# Altium PCB VM52-T2.PcbDoc (part 1 of 2)
Units mm, origin at the board's own origin, x right, y up, seen from the top; angles counter-clockwise.
Board outline 156.25 x 95.25 mm, 4 copper layers (Top Layer, Internal Plane 1, Internal Plane 2, Bottom Layer), stack 0 mm thick; 194 components, 129 nets, 738 pads, 719 vias.
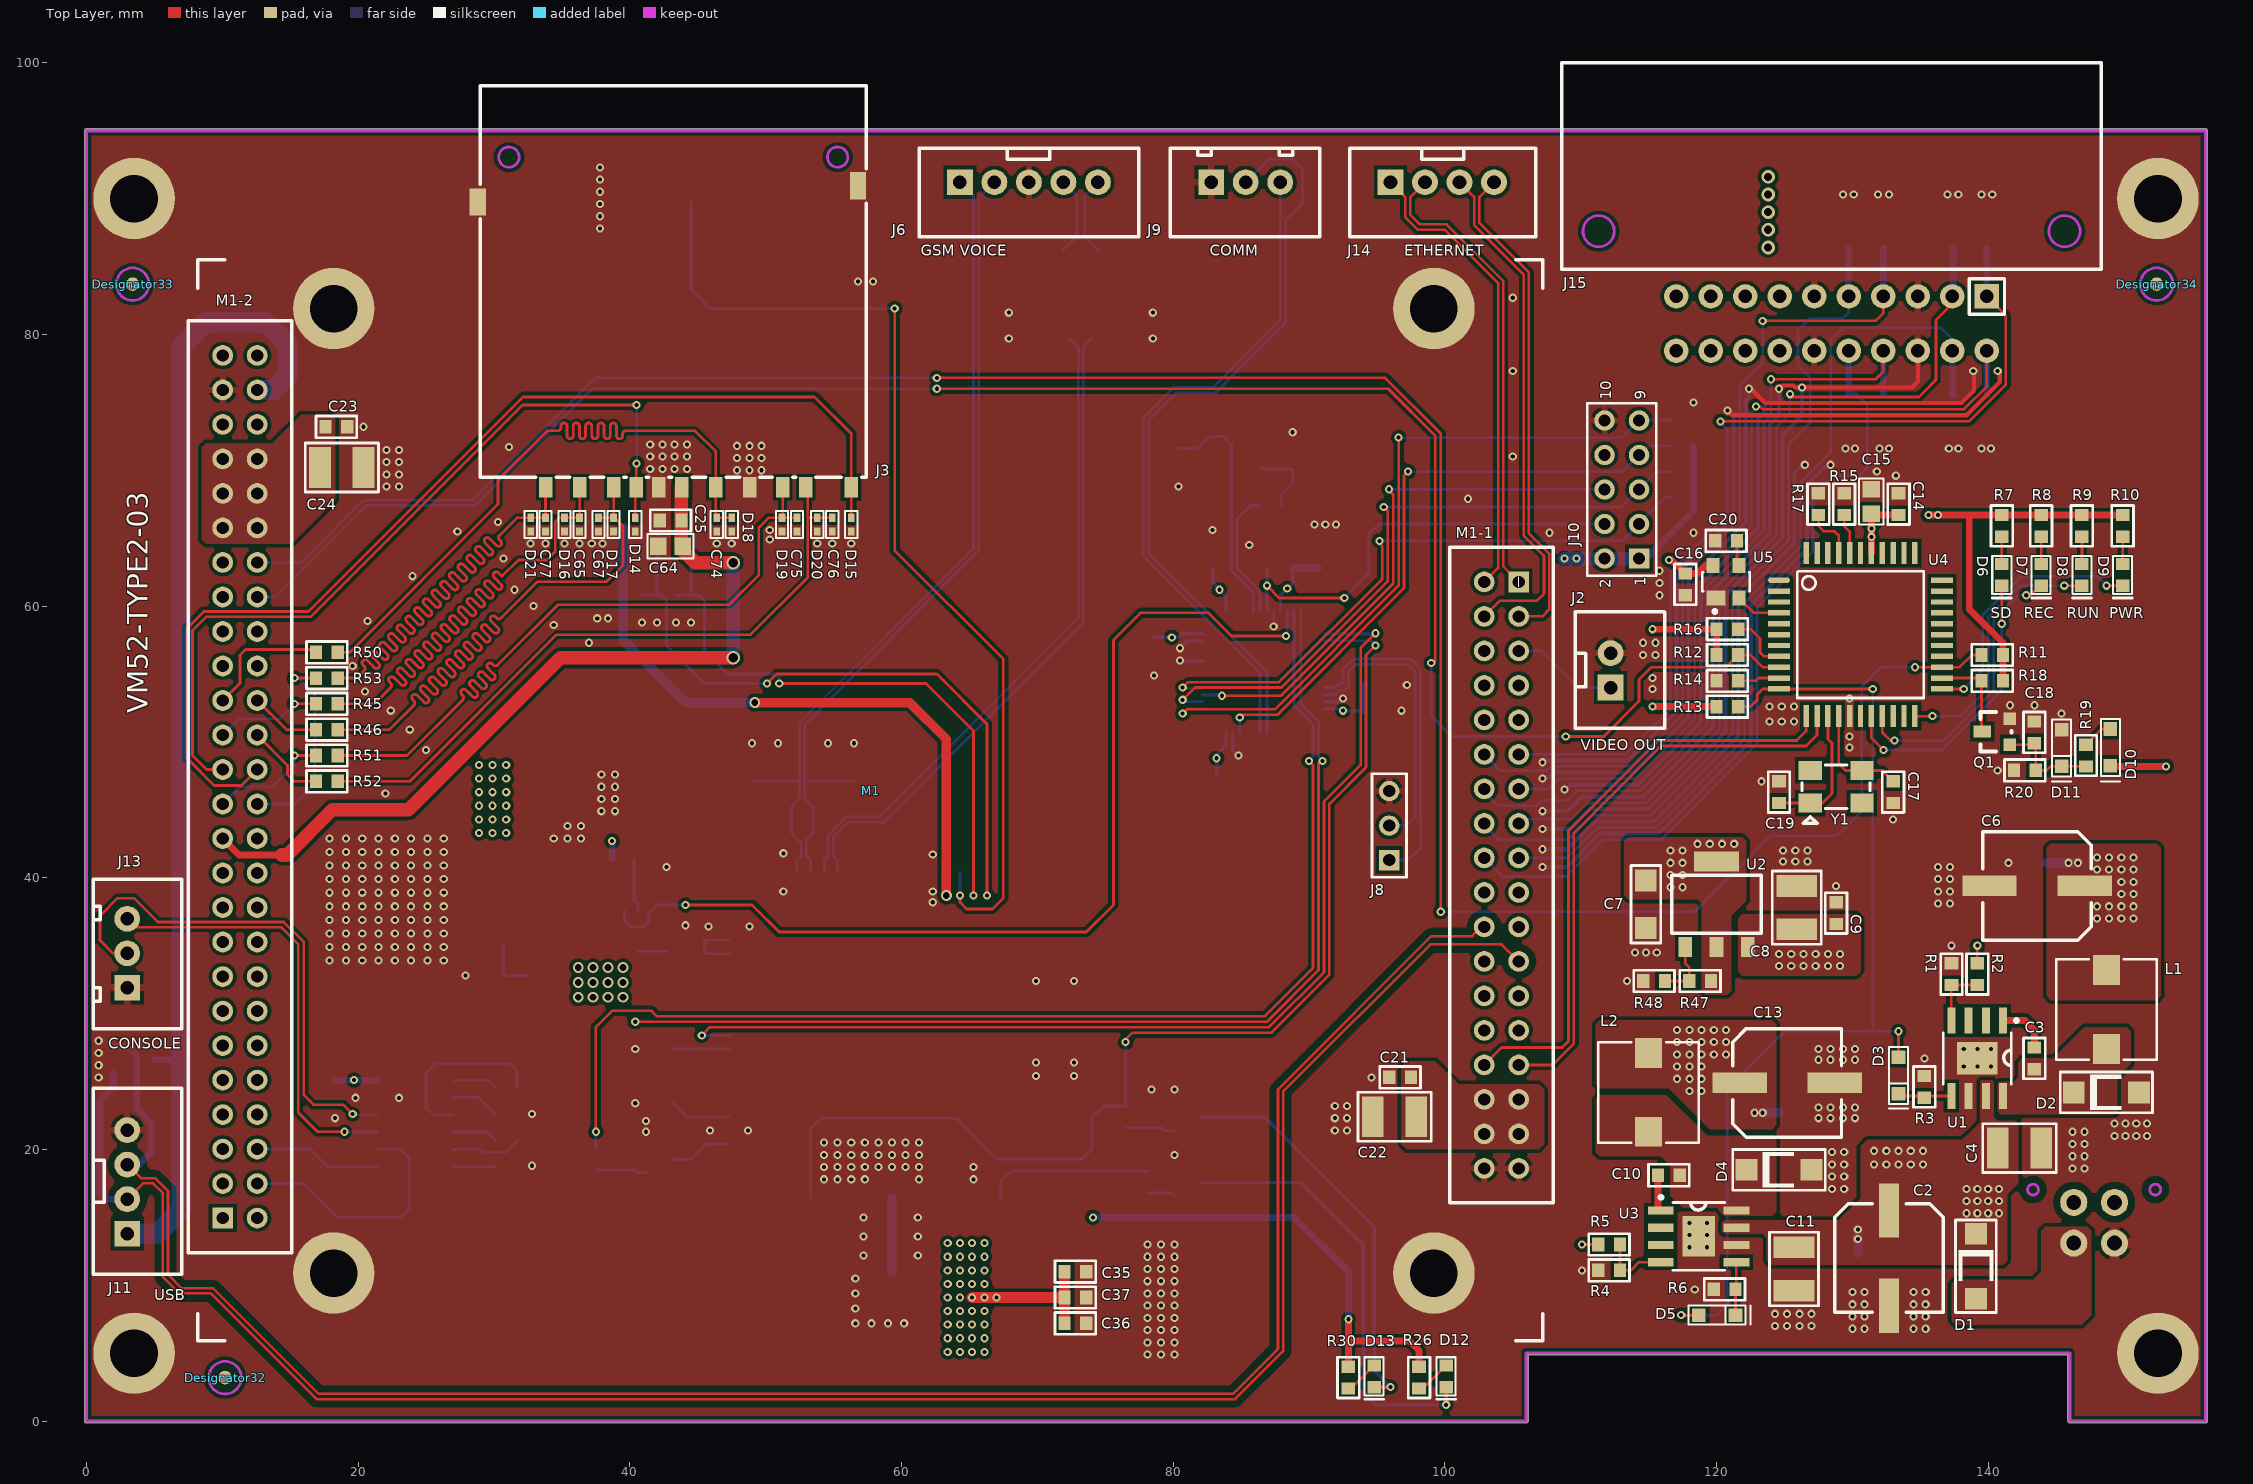
[diagram p0: Top Layer view]
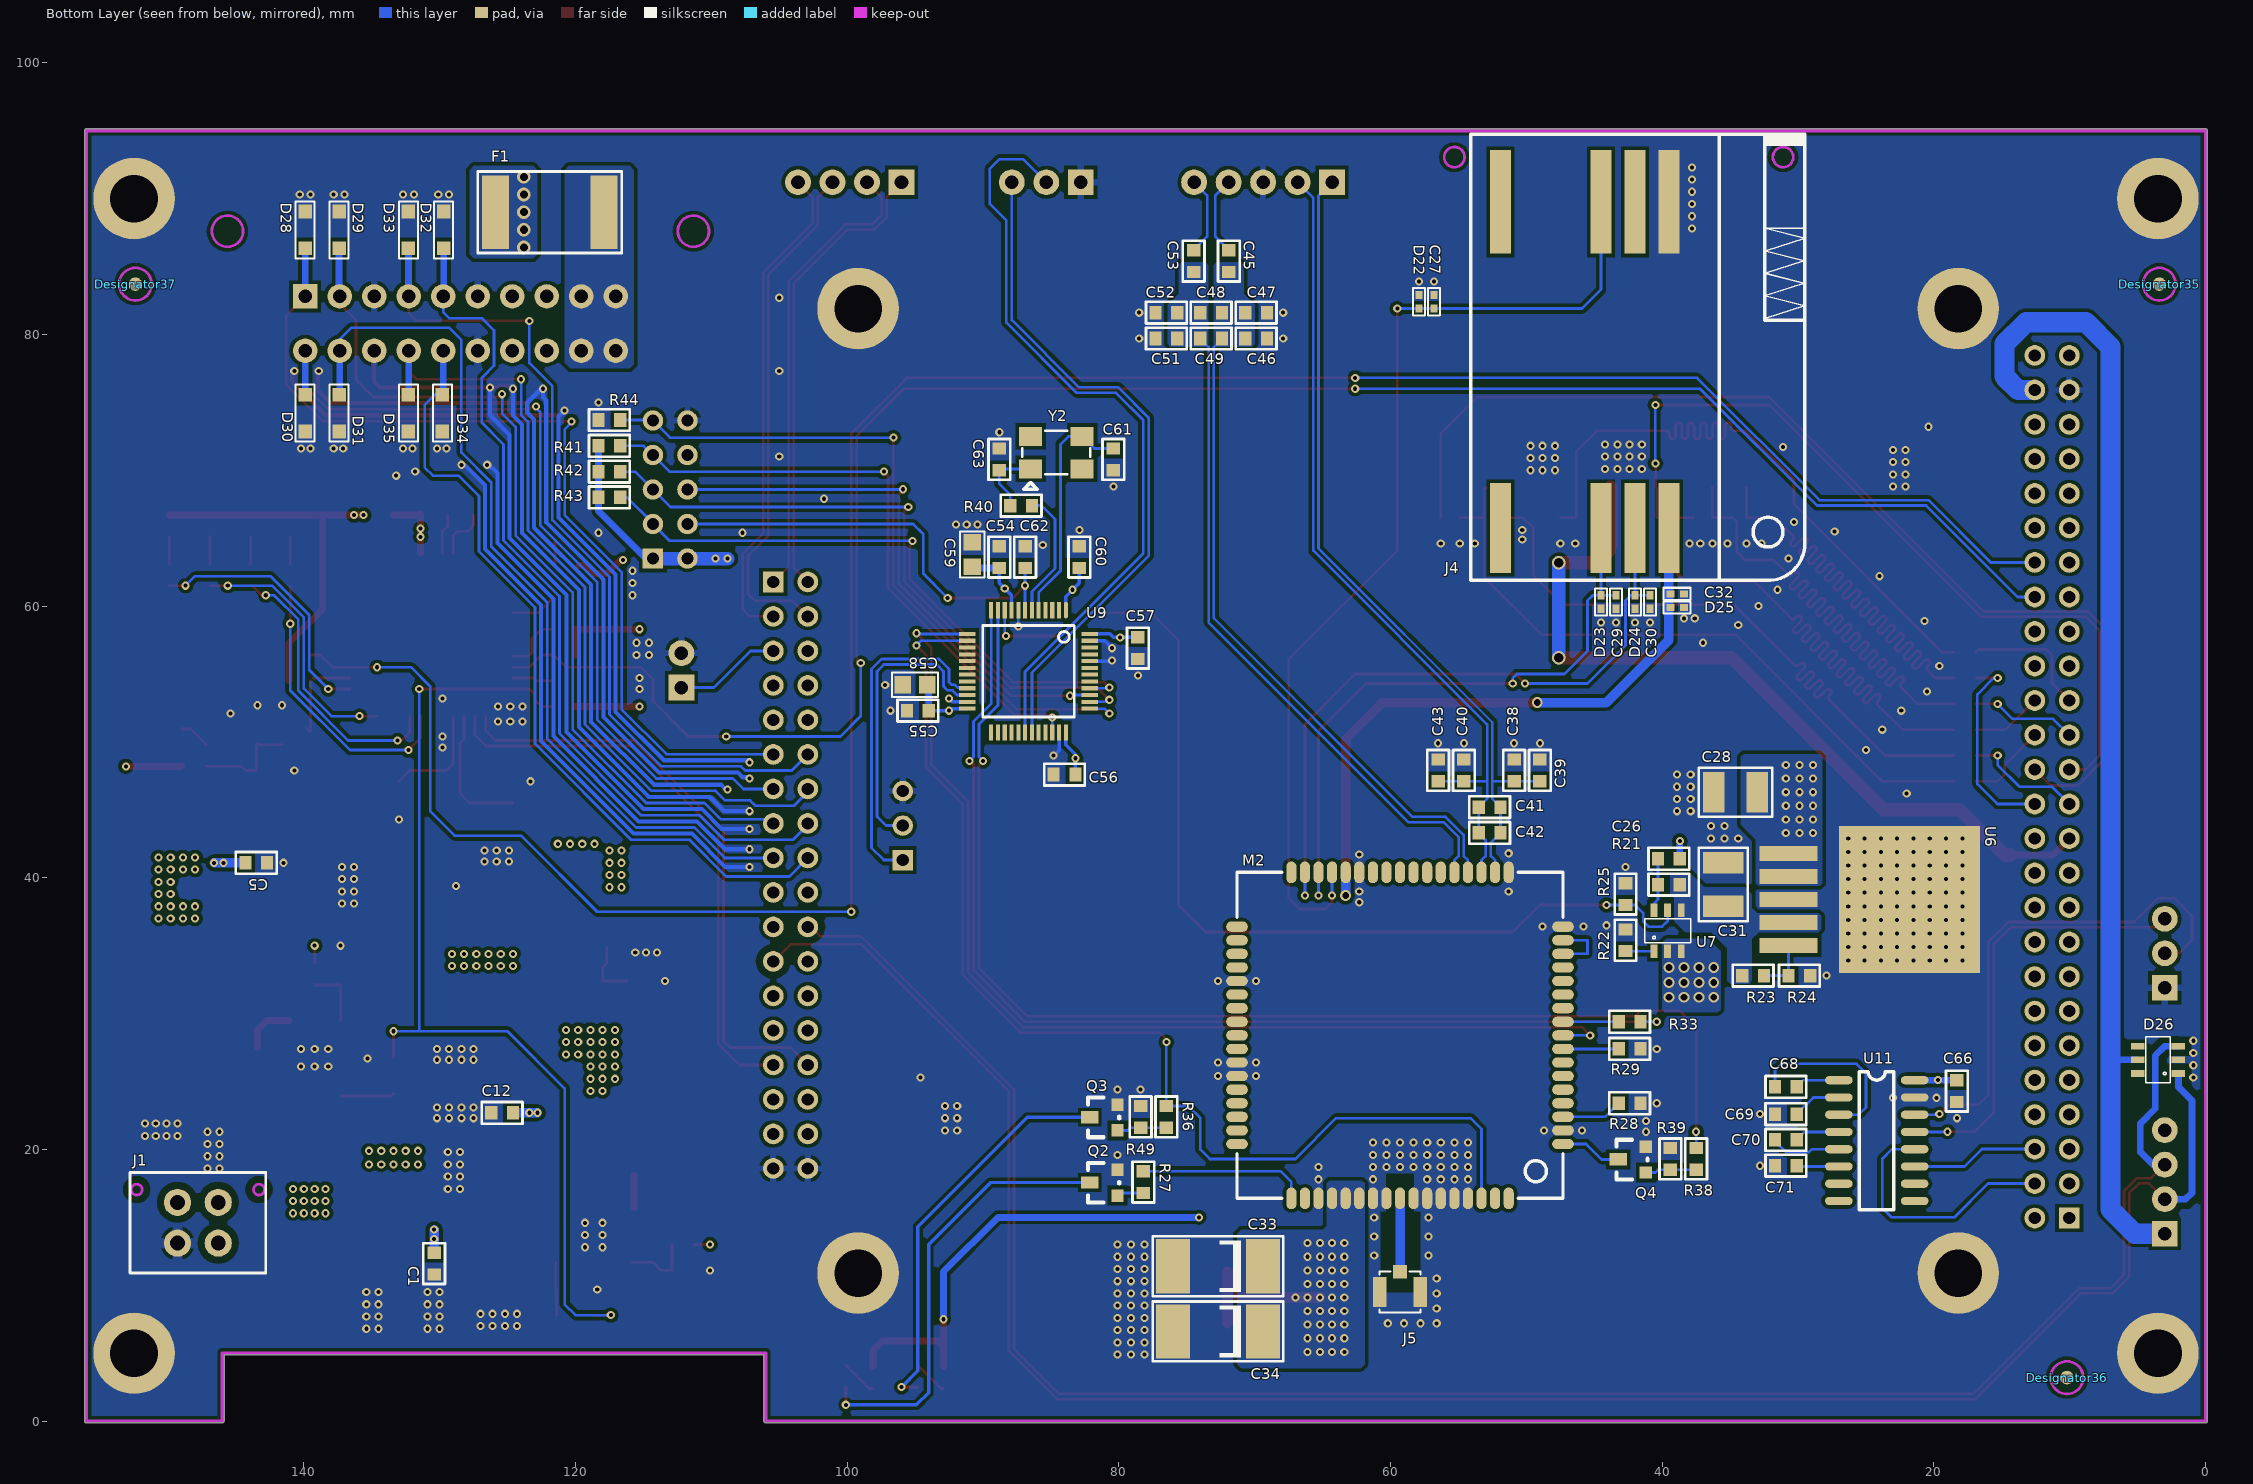
[diagram p1: Bottom Layer view, seen from below]
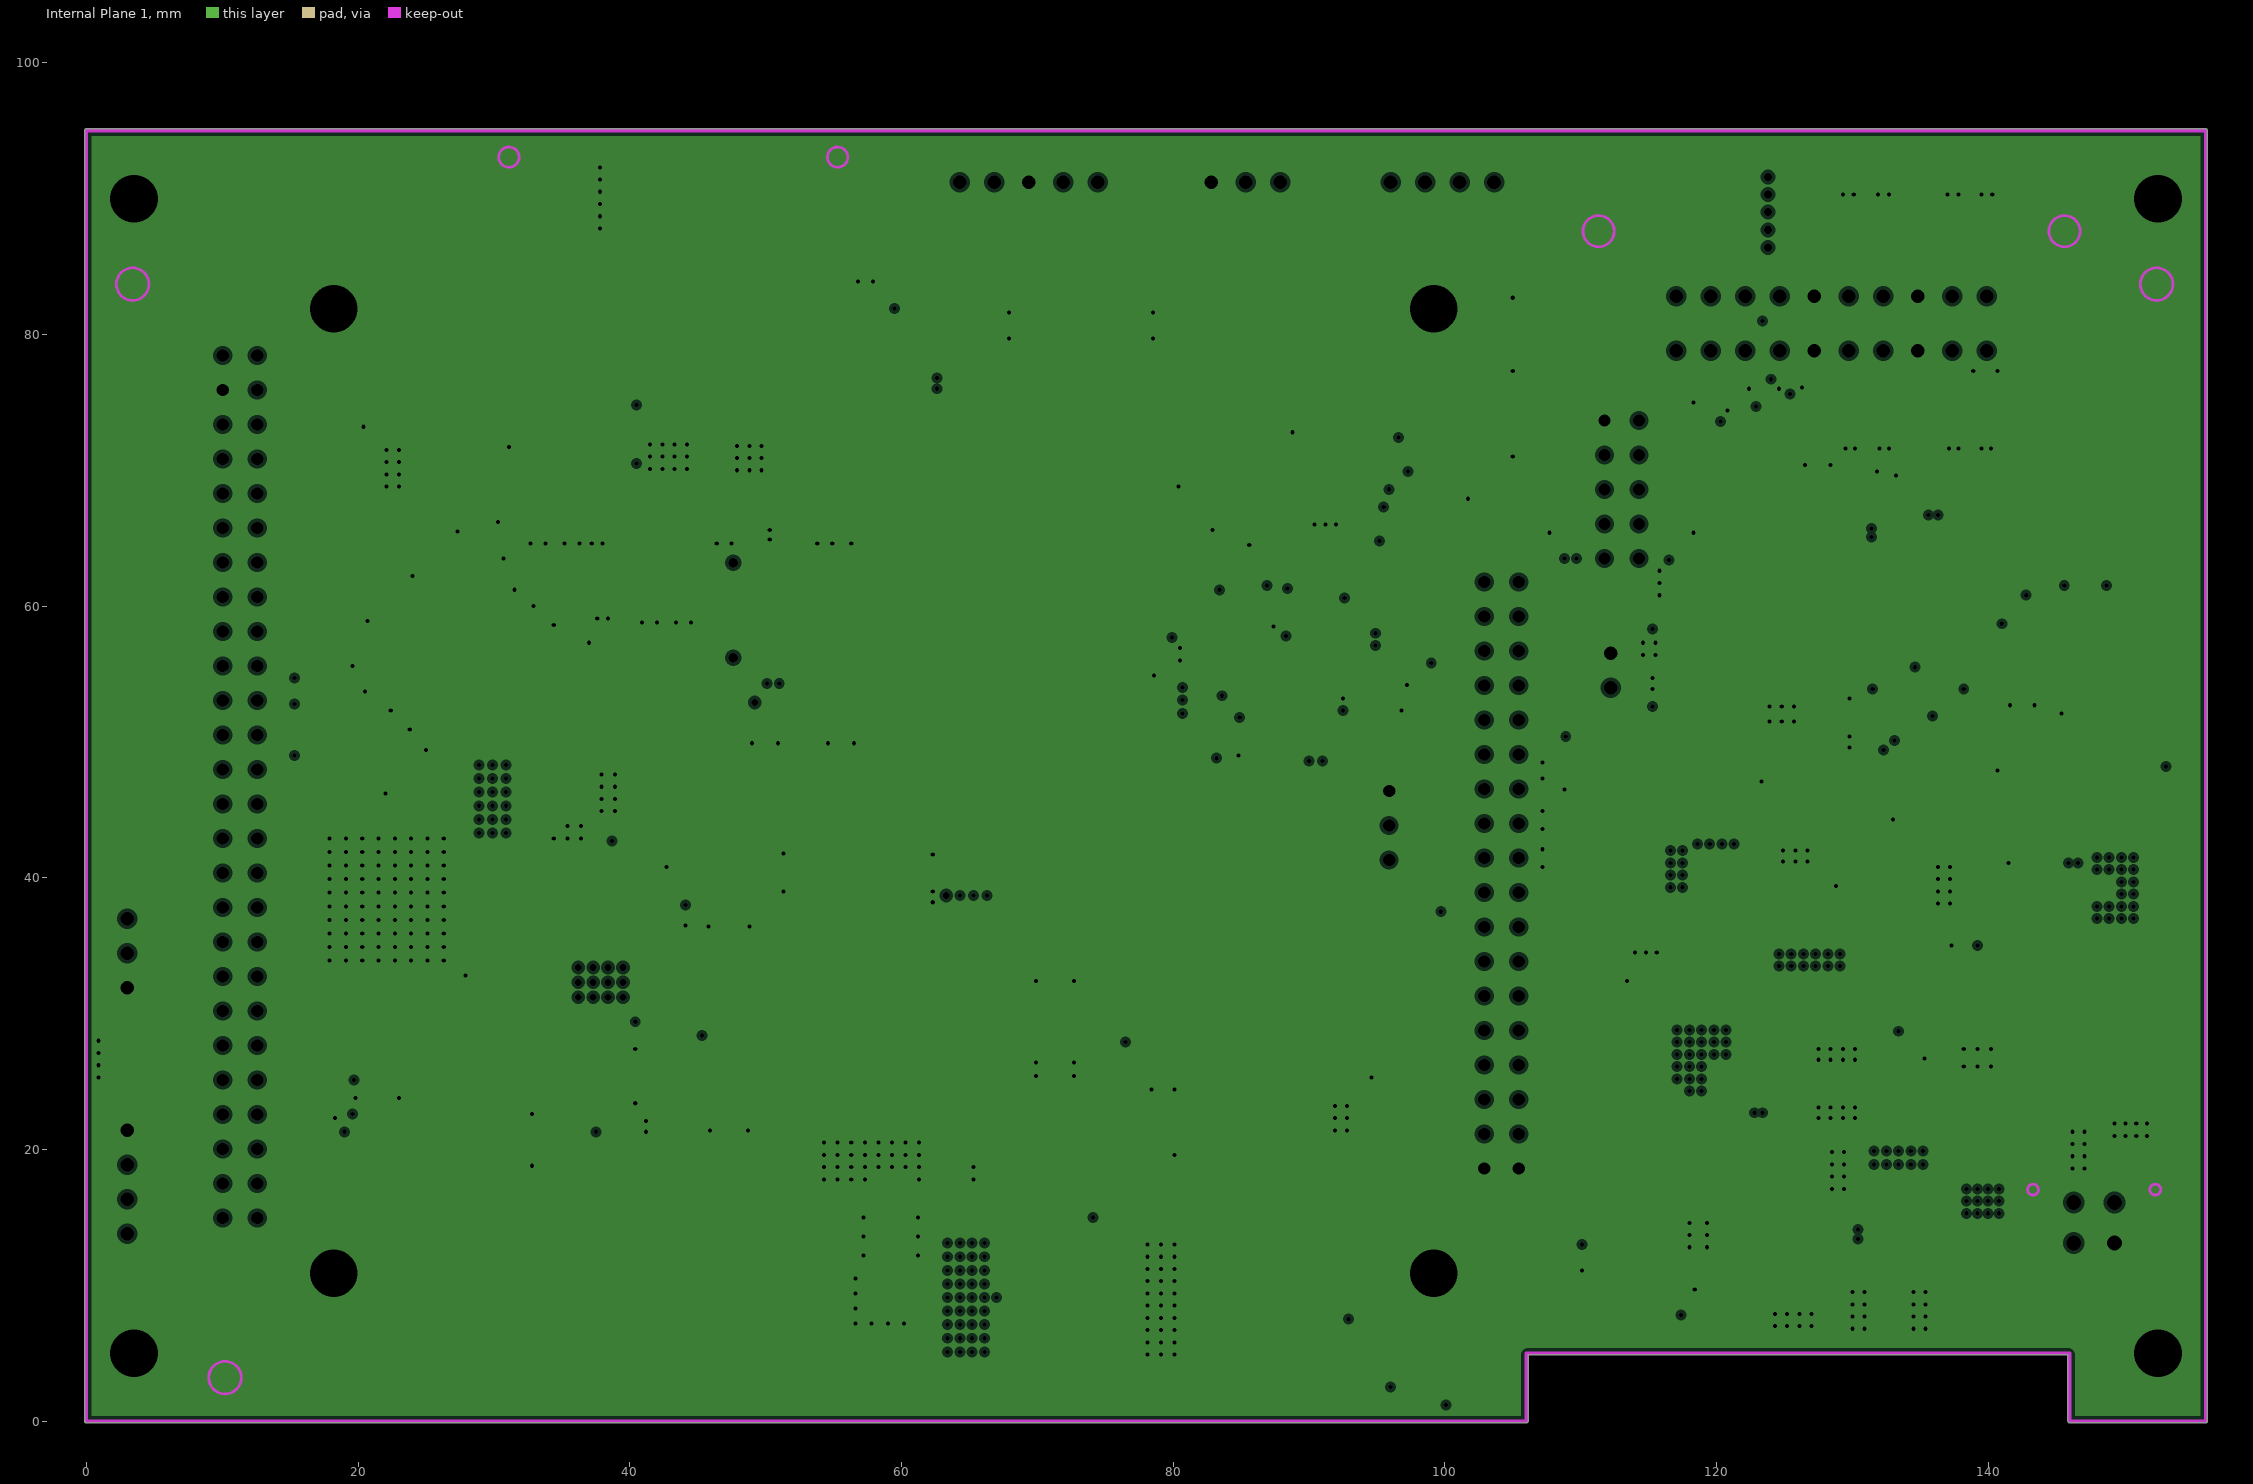
[diagram p2: Internal Plane 1, clearances drawn from the general rule]
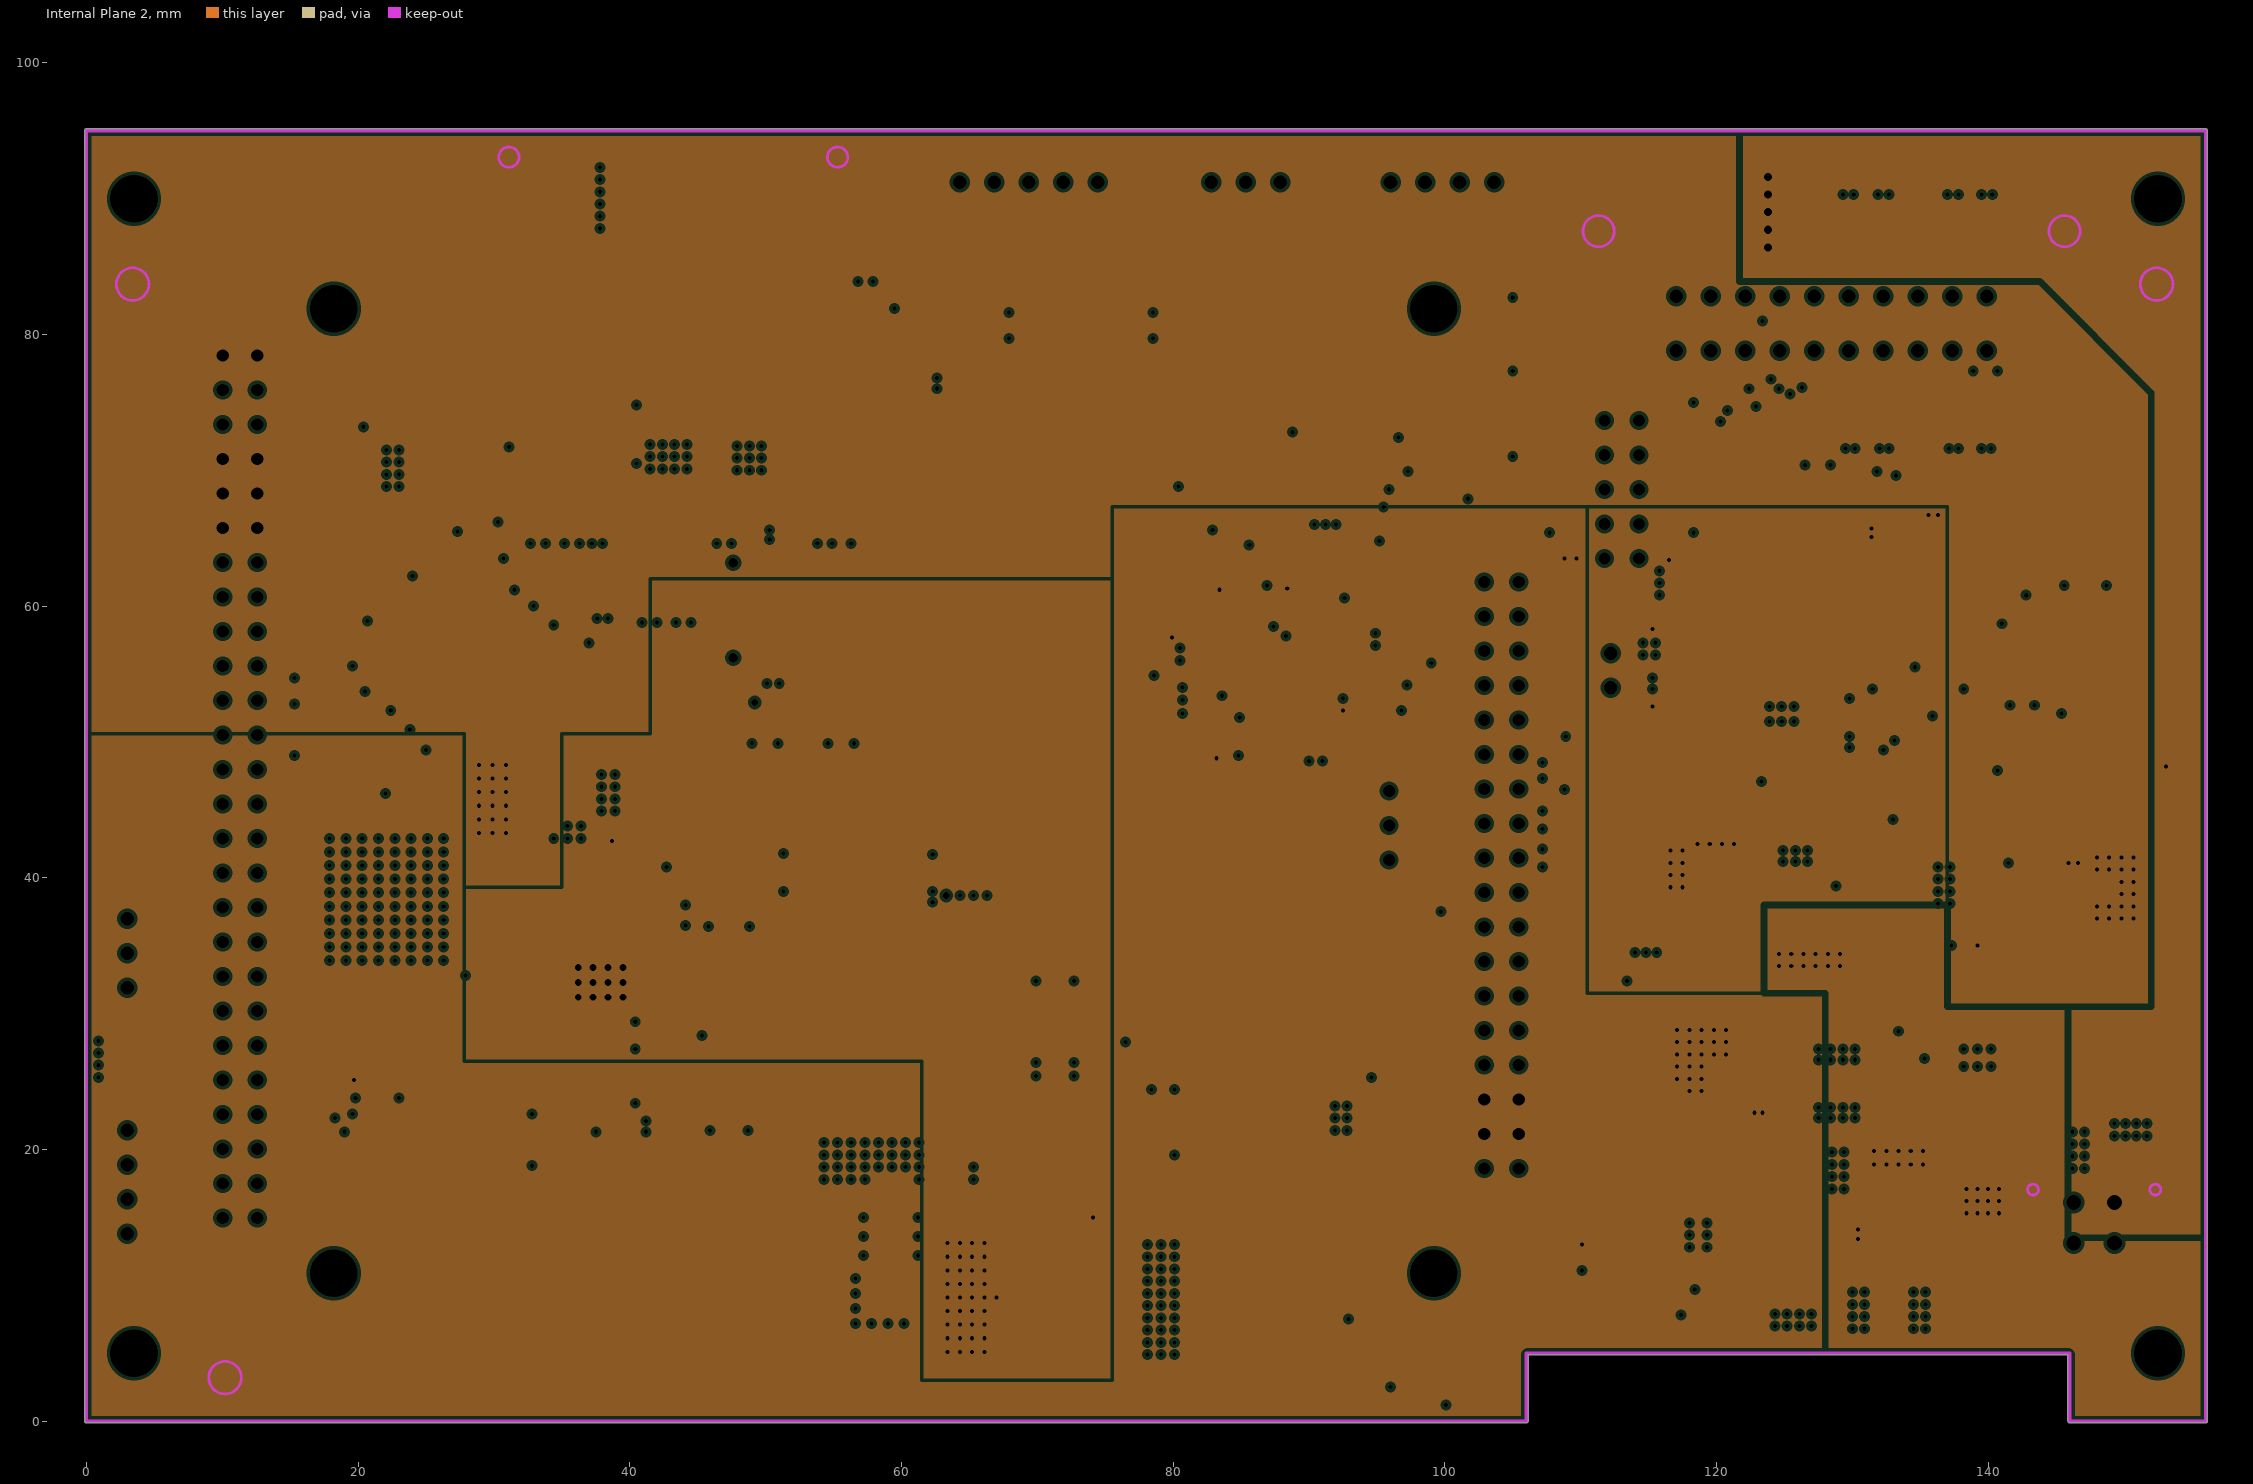
[diagram p3: Internal Plane 2, clearances drawn from the general rule]

## Layer stack, top to bottom
Top Layer: signal copper (thickness not stored)
Internal Plane 1: plane copper (thickness not stored)
Internal Plane 2: plane copper (thickness not stored)
Bottom Layer: signal copper (thickness not stored)

## Board outline
0,-0.127 cw(c0,0) -0.127,0 -0.127,95 cw(c0,95) 0,95.128 156,95.128 cw(c156,95) 156.127,95 156.127,0 cw(c156,0) 156,-0.127 146,-0.127 cw(c146,0) 145.873,0 145.873,4.873 106.127,4.873 106.127,0 cw(c106,0) 106,-0.127

## Design rules (kind name [scope] priority, off if disabled: settings)
Clearance Clearance_5 [InComponent('J1')] p1: gap=0.5
Clearance Clearance_4 [InNetClass('sd') vs InNet('GND')] p2: gap=0.2
Clearance Clearance_2 [InNetClass('otg') vs InPolygon AND InNet('GND')] p3: gap=0.5
Clearance Clearance_3 [INPolygon AND InNet('GND')] p4: gap=0.254
Clearance Clearance_1 [InNetClass('diff')] p5: gap=0.19
Clearance [All] p6: gap=0.2
ComponentClearance [All] p1: gap=0 collisioncheckmode=3 verticalgap=0 showdistances=FALSE
DiffPairsRouting [All] p1: maxlimit=0.19 minlimit=0.19 mostfreqgap=0.19 toplayer_minwidth=0.19 toplayer_maxwidth=0.19 toplayer_prefwidth=0.19 bottomlayer_minwidth=0.19 bottomlayer_maxwidth=0.19 bottomlayer_prefwidth=0.19 maxuncoupledlength=12.7
PlaneClearance PlaneClearance_1 [InPadClass('MT')] p1: clearance=1
PlaneClearance [All] p2: clearance=0.254
PlaneConnect PlaneConnect_3 [InPadClass('MT')] p1: planeconnectstyle=Direct reliefexpansion=0.508 reliefentries=4 reliefconductorwidth=0.254 reliefairgap=0.254
PlaneConnect PlaneConnect_1 [InComponent('M1') OR InComponent('J2') OR InComponent('J6') OR InComponent('J8') OR InComponent('J9') OR InComponent('J10') OR InComponent('J11') OR InComponent('J12') OR InComponent('J13') OR InComponent('J14') OR InComponent('J15')] p2: planeconnectstyle=Relief reliefexpansion=0.508 reliefentries=4 reliefconductorwidth=0.5 reliefairgap=0.254
PlaneConnect PlaneConnect_2 [InComponent('J1')] p3: planeconnectstyle=Relief reliefexpansion=0.508 reliefentries=4 reliefconductorwidth=0.8 reliefairgap=0.4
PlaneConnect [All] p4: planeconnectstyle=Direct reliefexpansion=0.508 reliefentries=4 reliefconductorwidth=0.5 reliefairgap=0.3
PolygonConnect PolygonConnect_3 [InComponent('J1')] p1: connectstyle=Relief reliefconductorwidth=0.8 reliefentries=4 polygonreliefangle="90 Angle" airgapwidth=0.254
PolygonConnect PolygonConnect_2 [InPadClass('MT')] p2: connectstyle=Direct reliefconductorwidth=0.254 reliefentries=4 polygonreliefangle="90 Angle" airgapwidth=0.254
PolygonConnect PolygonConnect_1 [InComponent('M1') OR InComponent('J2') OR InComponent('J6') OR InComponent('J8') OR InComponent('J9') OR InComponent('J10') OR InComponent('J11') OR InComponent('J12') OR InComponent('J13') OR InComponent('J14') OR InComponent('J15') vs InNet('GND')] p3: connectstyle=Relief reliefconductorwidth=0.5 reliefentries=4 polygonreliefangle="90 Angle" airgapwidth=0.254
PolygonConnect [All] p4: connectstyle=Direct reliefconductorwidth=0.254 reliefentries=4 polygonreliefangle="90 Angle" airgapwidth=0.254
RoutingVias [All] p1: holewidth=0.3 width=0.6 viastyle="Through Hole" minholewidth=0.3 minwidth=0.6 maxholewidth=0.3 maxwidth=0.6
SolderMaskExpansion [All] p1: expansion=0.102
Width [All] p1: maxlimit=4 minlimit=0.2 preferedwidth=0.2 minimp=50.000000 maximp=50.000000 favimp=50.000000
26 further rules are at their usual default settings.

## Classes and differential pairs
component class 1-power: C1 C2 C3 C4 C5 C6 C7 C8 C9 C10 C11 C12 C13 D1 D2 D3 D4 D5 J1 L1 L2 R1 R2 R3 R4 R5 R6 R47 R48 U1 U2 U3
component class 2-mcu: C14 C15 C16 C17 C18 C19 C20 D6 D7 D8 D9 D10 D11 Q1 R7 R8 R9 R10 R11 R12 R13 R14 R15 R16 R17 R18 R19 R20 U4 U5 Y1
component class 3-core_board: C21 C22 C23 C24 J2 M1
component class 4-storage: C25 C64 C65 C67 C74 C75 C76 C77 D14 D15 D16 D17 D18 D19 D20 D21 J3 R45 R46 R50 R51 R52 R53
component class 5-gsm: C26 C27 C28 C29 C30 C31 C32 C33 C34 C35 C36 C37 C38 C39 C40 C41 C42 C43 C45 C46 C47 C48 C49 C51 C52 C53 D12 D13 D22 D23 D24 D25 J4 J5 J6 M2 Q2 Q3 Q4 R21 R22 R23 R24 R25 R26 R27 R28 R29 R30 R33 R36 R38 R39 R49 U6 U7
component class 6-gsm_ctrl: C54 C55 C56 C57 C58 C59 C60 C61 C62 C63 J8 J9 J10 R40 R41 R42 R43 R44 U9 Y2
component class 7-serial-interfaces: C66 C68 C69 C70 C71 D26 J11 J13 J14 U11
component class 8-connector: D28 D29 D30 D31 D32 D33 D34 D35 F1 J15
pad class MT: Free-MT1 Free-MT2 Free-MT3 Free-MT4 M1-MT5 M1-MT6 M1-MT7 M1-MT8
net class diff: ERX_N ERX_P ETX_N ETX_P MIC_N MIC_P OTG_N OTG_P SPK_N SPK_P
net class otg: OTG_N OTG_P
net class sd: B-CLK B-CMD B-DAT0 B-DAT1 B-DAT2 B-DAT3
differential pair ERX: +ERX_P -ERX_N
differential pair ETX: +ETX_P -ETX_N
differential pair MIC: +MIC_P -MIC_N
differential pair SPK: +SPK_P -SPK_N
differential pair OTG: +OTG_P -OTG_N

## Components (designator, comment, footprint, x,y, rotation, side; value= is the part's Value field where it differs from the comment)
C1 "0.1uF" 0603 130.4,11.6 r0 bottom
C2 "220uF/25V" DL-8*10.5 132.7,12 r0 top
C3 "0.01uF" 0603 143.4,26.7 r180 top
C4 "2.2uF/25V" 1210 143.9,20.1 r180 top
C5 "0.1uF" 0603 143.5,41.1 r270 bottom
C6 "220uF/25V" DL-8*10.5 143.6,39.4 r270 top
C7 "22uF/6.3V" 1206 114.8,36.3 r90 top
C8 "2.2uF/25V" 1210 125.9,39.4 r270 top
C9 "0.1uF" 0603 128.8,37.4 r180 top
C10 "0.01uF" 0603 116.5,18.1 r270 top
C11 "2.2uF/25V" 1210 125.7,9.6 r90 top
C12 "0.1uF" 0603 125.4,22.7 r90 bottom
C13 "220uF/25V" DL-8*10.5 125.2,24.9 r90 top
C14 "0.1uF" 0603 133.4,67.5 r0 top
C15 "10uF/6.3V" 0805 131.4,68.6 r270 top
C16 "0.1uF" 0603 117.7,61.6 r180 top
C17 "27pF" 0603 133,46.3 r180 top
C18 "0.1uF" 0603 143.4,50.7 r180 top
C19 "27pF" 0603 124.6,46.3 r0 top
C20 "0.1uF" 0603 120.7,64.8 r270 top
C21 "0.1uF" 0603 96.7,25.3 r270 top
C22 "22uF/10V" 1210 97.9,22.4 r180 top
C23 "0.1uF" 0603 18.4,73.2 r90 top
C24 "22uF/10V" 1210 17.2,70.2 r0 top
C25 "0.1uF" 0603 43,66.3 r90 top
C26 "2.2uF/6.3V" 0603 39.5,41.4 r270 bottom
C27 "33pF" 0402 56.8,81.9 r90 bottom
C28 "10uF/10V" 1210 36.2,46.3 r180 bottom
C29 "33pF" 0402 43.4,60.8 r270 bottom
C30 "33pF" 0402 40.9,60.8 r270 bottom
C31 "10uF/10V" 1210 35.5,41.1 r270 bottom
C32 "0.1uF" 0402 39.4,60.9 r180 bottom
C33 "220uF/10V" 7343 72.7,11.4 r270 bottom
C34 "220uF/10V" 7343 72.7,6.6 r270 bottom
C35 "0.1uF" 0603 72.8,11 r90 top
C36 "33pF" 0603 72.8,7.2 r90 top
C37 "10pF" 0603 72.8,9.1 r90 top
C38 "33pF" 0603 50.9,47.9 r180 bottom
C39 "10pF" 0603 49,47.9 r180 bottom
C40 "33pF" 0603 54.6,47.9 r0 bottom
C41 "33pF" 0603 52.7,45.2 r270 bottom
C42 "10pF" 0603 52.7,43.3 r270 bottom
C43 "10pF" 0603 56.5,47.9 r0 bottom
C45 "0.22uF" 0603 71.9,85.4 r0 bottom
C46 "33pF" 0603 69.9,79.7 r270 bottom
C47 "10pF" 0603 69.9,81.6 r270 bottom
C48 "33pF" 0603 73.2,81.6 r270 bottom
C49 "10pF" 0603 73.2,79.7 r270 bottom
C51 "33pF" 0603 76.5,79.7 r270 bottom
C52 "10pF" 0603 76.5,81.6 r270 bottom
C53 "0.22uF" 0603 74.5,85.4 r0 bottom
C54 "0.1uF" 0603 88.8,63.6 r0 bottom
C55 "0.1uF" 0603 94.8,52.3 r270 bottom
C56 "0.1uF" 0603 84,47.6 r270 bottom
C57 "0.1uF" 0603 78.6,56.9 r180 bottom
C58 "10uF/6.3V" 0805 94.1,54.2 r0 bottom
C59 "10uF/6.3V" 0805 90.8,62.9 r90 bottom
C60 "0.1uF" 0603 82.9,63.6 r0 bottom
C61 "20pF" 0603 80.4,70.8 r0 bottom
C62 "0.1uF" 0603 86.9,63.6 r180 bottom
C63 "20pF" 0603 88.8,70.8 r180 bottom
C64 "4.7uF/6.3V" 0805 42.1,64.4 r0 top
C65 "47pF" 0402 36.3,66.5 r270 top
C66 "0.1uF" 0603 18.3,24.3 r180 bottom
C67 "47pF" 0402 37.7,66.5 r270 top
C68 "0.1uF" 0603 30.9,24.6 r270 bottom
C69 "0.1uF" 0603 30.9,22.6 r270 bottom
C70 "0.1uF" 0603 30.9,20.7 r270 bottom
C71 "0.1uF" 0603 30.9,18.8 r270 bottom
C74 "47pF" 0402 46.4,66.5 r270 top
C75 "47pF" 0402 52.3,66.5 r270 top
C76 "47pF" 0402 54.9,66.5 r270 top
C77 "47pF" 0402 33.8,66.5 r270 top
D1 "B340A" B320A 139.1,9 r90 top
D2 "B340A" B320A 151.1,24.2 r180 top
D3 "1N5819HW" 1N5819 133.4,24.1 r90 top
D4 "B340A" B320A 127,18.5 r180 top
D5 "1N5819HW" 1N5819 121.4,7.8 r180 top
D6 "LED GREEN" LED0603 141,63.1 r0 top
D7 "LED GREEN" LED0603 143.9,63.1 r0 top
D8 "LED GREEN" LED0603 146.9,63.1 r0 top
D9 "LED GREEN" LED0603 149.9,63.1 r0 top
D10 "MM3Z6V2ST1G" MM3Z5V1ST1G 149,49.6 r90 top
D11 "1N5819HW" 1N5819 145.4,48.2 r90 top
D12 "LED GREEN" LED0603 100.1,4.1 r0 top
D13 "LED GREEN" LED0603 94.8,4.1 r0 top
D14 "SMV0402G5R6N121T" 0402 40.4,66.5 r270 top
D15 "SMV0402G5R6N121T" 0402 56.3,65.5 r90 top
D16 "SMV0402G5R6N121T" 0402 35.2,65.5 r90 top
D17 "SMV0402G5R6N121T" 0402 38.8,65.5 r90 top
D18 "SMV0402G5R6N121T" 0402 47.5,65.5 r90 top
D19 "SMV0402G5R6N121T" 0402 51.2,65.5 r90 top
D20 "SMV0402G5R6N121T" 0402 53.8,65.5 r90 top
D21 "SMV0402G5R6N121T" 0402 32.7,65.5 r90 top
D22 "SMV0402G5R6N121T" 0402 57.9,82.9 r270 bottom
D23 "SMV0402G5R6N121T" 0402 44.5,59.8 r90 bottom
D24 "SMV0402G5R6N121T" 0402 42,59.8 r90 bottom
D25 "SMV0402G5R6N121T" 0402 38.4,59.9 r0 bottom
D26 "SRV05-4" SOT23-6 2,25.6 r90 bottom
D28 "PESD5V0L1BA" SOD323 139.9,87.7 r90 bottom
D29 "PESD5V0L1BA" SOD323 137.4,87.7 r90 bottom
D30 "PESD5V0L1BA" SOD323 139.9,74.2 r270 bottom
D31 "PESD5V0L1BA" SOD323 137.4,74.2 r270 bottom
D32 "PESD5V0L1BA" SOD323 129.7,87.7 r270 bottom
D33 "PESD5V0L1BA" SOD323 132.3,87.7 r270 bottom
D34 "PESD5V0L1BA" SOD323 129.8,74.2 r90 bottom
D35 "PESD5V0L1BA" SOD323 132.3,74.2 r90 bottom
Designator32 "Comment" MARK 10.2,3.2 r0 top
Designator33 "Comment" MARK 3.4,83.7 r0 top locked
Designator34 "Comment" MARK 152.4,83.7 r0 top locked
Designator35 "Comment" MARK 3.4,83.7 r180 bottom locked
Designator36 "Comment" MARK 10.2,3.2 r180 bottom locked
Designator37 "Comment" MARK 152.4,83.7 r180 bottom locked
F1 "3A/16V" 2920 125.9,89 r180 bottom
J1 "POWER" 3030WV-F-2*2P 147.8,14.6 r180 bottom
J2 "VIDEO OUT" CON-2PIN 112.2,54 r270 top
J3 "SDCARD" SDCARD 43.2,69.5 r180 top locked
J4 "SIMCARD" SIM_CARD1 41.8,77.9 r270 bottom locked
J5 "Header 3" ANT 59.3,9.5 r0 bottom
J6 "Header 5" CON-5PIN 64.3,91.2 r0 top
J8 "DEBUG UART" HDR1X3 95.9,41.3 r90 top
J9 "GSM CONTROL UART" CONN-3P 82.8,91.2 r0 top
J10 "JTAG" HDR2X5 114.3,63.5 r90 top
J11 "USB0" CON-4PIN 3,13.8 r90 top
J13 "CONSOLE" CONN-3P 3,31.9 r90 top
J14 "ETHERNET" CON-4PIN 96,91.2 r0 top
J15 "Header 10X2" CONN2X10 139.9,78.8 r270 top locked
L1 "8.2uH/3A" IND_8.2UH_3A 148.7,30.3 r0 top
L2 "8.2uH/3A" IND_8.2UH_3A 115,24.2 r0 top
M1 "CPU-BOARD" CPU-BOARD 18.2,81.9 r90 top locked
M2 "SIM800" sim800 47.3,20.4 r0 bottom
Q1 "S9014" NPN 141.6,49.8 r90 top
Q2 "S9014" NPN 80.1,16.6 r90 bottom
Q3 "S9014" NPN 80.1,21.4 r90 bottom
Q4 "S9014" NPN 41.2,18.3 r90 bottom
R1 "1.1K/1%" 0603 137.3,32.9 r180 top
R2 "3.16K/1%" 0603 139.2,32.9 r180 top
R3 "100K" 0603 135.3,24.6 r180 top
R4 "1.1K/1%" 0603 112.1,11.1 r270 top
R5 "1.74K/1%" 0603 112.1,13 r270 top
R6 "100K" 0603 120.6,9.7 r270 top
R7 "1.2K" 0603 141,65.9 r0 top
R8 "1.2K" 0603 143.9,65.9 r0 top
R9 "1.2K" 0603 146.9,65.9 r0 top
R10 "1.2K" 0603 149.9,65.9 r0 top
R11 "10K" 0603 140.3,56.4 r270 top
R12 "10K" 0603 120.8,56.4 r90 top
R13 "4.7K" 0603 120.8,52.6 r270 top
R14 "0" 0603 120.8,54.5 r270 top
R15 "0" 0603 129.4,67.5 r0 top
R16 "10K" 0603 120.8,58.3 r270 top
R17 "0" 0603 127.5,67.5 r0 top
R18 "10K" 0603 140.3,54.5 r270 top
R19 "15K" 0603 147.2,49 r180 top
R20 "47K" 0603 142.7,47.9 r270 top
R21 "10K" 0603 39.5,39.5 r270 bottom
R22 "1K" 0603 42.7,35.4 r180 bottom
R23 "249/1%" 0603 33.3,32.8 r270 bottom
R24 "110/1%" 0603 29.9,32.8 r90 bottom
R25 "10K" 0603 42.7,38.8 r180 bottom
R26 "1.2K" 0603 98.1,3.2 r0 top
R27 "4.7K" 0603 78.2,17.6 r0 bottom
R28 "10K" 0603 42.4,23.4 r270 bottom
R29 "10K" 0603 42.4,27.4 r270 bottom
R30 "1.2K" 0603 92.9,3.2 r0 top
R33 "1K" 0603 42.4,29.4 r270 bottom
R36 "4.7K" 0603 76.5,22.4 r0 bottom
R38 "4.7K" 0603 37.5,19.3 r0 bottom
R39 "10K" 0603 39.4,19.3 r180 bottom
R40 "5.1" 0603 87.2,67.4 r270 bottom
R41 "10K" 0603 117.5,71.8 r90 bottom
R42 "10K" 0603 117.5,69.9 r90 bottom
R43 "10K" 0603 117.5,68 r90 bottom
R44 "10K" 0603 117.5,73.7 r270 bottom
R45 "33" 0603 17.7,52.8 r90 top
R46 "33" 0603 17.7,50.9 r90 top
R47 "240/1%" 0603 118.8,32.4 r270 top
R48 "392/1%" 0603 115.4,32.4 r270 top
R49 "10K" 0603 78.4,22.4 r180 bottom
R50 "33" 0603 17.7,56.6 r90 top
R51 "33" 0603 17.7,49 r90 top
R52 "33" 0603 17.7,47.1 r90 top
R53 "33" 0603 17.7,54.7 r90 top
U1 "LM22676MR-ADJ" PSO8 141.1,29.5 r180 top
U2 "LM317EMP" SOT-223 120,34.9 r0 top
U3 "LM22676MR-ADJ" PSO8 115.9,15.5 r270 top
U4 "IAP10L14X" LQFP44 124.6,61.9 r0 top
U5 "MAX812R" SOT143 120,60.6 r0 top
U6 "MIC29302AWU" TO-263 30.8,41.8 r270 bottom
U7 "TPS27081A" SOT23-6 40.6,34.6 r180 bottom
U9 "STM32F100C8T6" LQFP48 83.9,59.7 r270 bottom
U11 "MAX3232" SO-16 27,25.1 r270 bottom
Y1 "25MHz" SMD-XTAL-5032 128.8,46.7 r0 top
Y2 "8MHz" SMD-XTAL-5032 84.6,71.3 r180 bottom

## Footprints (in the part's own frame and the unit in brackets; to place one, negate y for a bottom-side part, rotate by r counter-clockwise, add the part's x,y. Pads: shape width x height; smd on the part's side, far side on the other; paste and mask are expansions set on the pad)
1N5819 [mm]
  rect 1x1 smd: 1(2.7,0) 2(0,0)
  silkscreen extent -1.1,-0.7 3.45,0.7
0402 [mm]
  rect 0.6x0.5 smd: 1(0,0) 2(1,0)
  silkscreen extent -0.5,-0.45 1.5,0.45
0603 [mm]
  rect 1x0.9 smd: 1(0,0.8) 2(0,-0.8)
  silkscreen extent -0.8,-1.5 0.8,1.5
0805 [mm]
  rect 1.2x1.3 smd: 1(0,0) 2(1.8,0)
  silkscreen extent -0.8,-0.9 2.6,0.9
1206 [mm]
  rect 1.6x1.6 smd: 1(0,0) 2(3.5,0)
  silkscreen extent -1.1,-1.1 4.6,1.1
1210 [mm]
  rect 1.6x3 smd: 1(0,0) 2(3.2,0)
  silkscreen extent -1.1,-1.8 4.3,1.8
2920 [mm]
  rect 2x5.4 smd: 1(0,0) 2(8,0)
  silkscreen extent -1.3,-3 9.3,3
3030WV-F-2*2P [mm]
  round 2 hole 1.1: 1(1.5,-1.5) 2(-1.5,-1.5) 3(1.5,1.5) 4(-1.5,1.5)
  Keep-Out Layer circle w0.2: c-4.5,2.44 r0.4
  Keep-Out Layer circle w0.2: c4.5,2.44 r0.4
  silkscreen extent -5,-3.7 5,3.7
7343 [mm]
  rect 4x2.5 smd: 1(0,3.3) 2(0,-3.3)
  silkscreen extent -2.2,-4.8 2.2,4.8
ANT [mm]
  rect 1x1 smd: 1(0,-1.5)
  rect 1x2.2 smd: 2(1.5,0) 3(-1.5,0)
  silkscreen extent -1.5,-1.5 1.5,1.5
B320A [mm]
  rect 1.6x1.6 smd: 1(0,0) 2(4.8,0)
  silkscreen extent -1,-1.5 5.8,1.5
CON-2PIN [mm]
  rect 1.9x1.9 hole 1: 1(0,0)
  round 1.9 hole 1: 2(-2.54,0)
  silkscreen extent -5.58,-2.6 2.99,3.99
CON-4PIN [mm]
  rect 1.9x1.9 hole 1: 1(0,0)
  round 1.9 hole 1: 2(2.54,0) 3(5.08,0) 4(7.62,0)
  silkscreen extent -3,-4 10.7,2.5
CON-5PIN [mm]
  rect 1.9x1.9 hole 1: 1(0,0)
  round 1.9 hole 1: 2(2.54,0) 3(5.08,0) 4(7.62,0) 5(10.16,0)
  silkscreen extent -3,-4 13.16,2.51
CONN2X10 [mm]
  rect 1.8x1.8 hole 1: 1(-4,0)
  round 1.8 hole 1: 2(0,0) 3(-4,-2.54) 4(0,-2.54) 5(-4,-5.08) 6(0,-5.08) 7(-4,-7.62) 8(0,-7.62) 9(-4,-10.16) 10(0,-10.16) 11(-4,-12.7) 12(0,-12.7) 13(-4,-15.24) 14(0,-15.24) 15(-4,-17.78) 16(0,-17.78) 17(-4,-20.32) 18(0,-20.32) 19(-4,-22.86) 20(0,-22.86)
  Keep-Out Layer circle w0.2: c-8.8,-28.58 r1.15
  Keep-Out Layer circle w0.2: c-8.8,5.72 r1.15
  silkscreen extent -21.2,-31.28 -2.7,8.42
CONN-3P [mm]
  rect 1.9x1.9 hole 1: 1(0,0)
  round 1.9 hole 1: 2(2.54,0) 3(5.08,0)
  silkscreen extent -3,-4 8,2.51
CPU-BOARD [mm]
  rect 1.524x1.524 hole 0.9: A1(-66.95,8.17) B1(-20.12,-87.24)
  round 1.524 hole 0.9: A2(-66.95,5.63) A3(-64.41,8.17) A4(-64.41,5.63) A5(-61.87,8.17) A6(-61.87,5.63) A7(-59.33,8.17) A8(-59.33,5.63) A9(-56.79,8.17) A10(-56.79,5.63) A11(-54.25,8.17) A12(-54.25,5.63) A13(-51.71,8.17) A14(-51.71,5.63) A15(-49.17,8.17) A16(-49.17,5.63) A17(-46.63,8.17) A18(-46.63,5.63) A19(-44.09,8.17) A20(-44.09,5.63) A21(-41.55,8.17) A22(-41.55,5.63) A23(-39.01,8.17) A24(-39.01,5.63) A25(-36.47,8.17) A26(-36.47,5.63) A27(-33.93,8.17) A28(-33.93,5.63) A29(-31.39,8.17) A30(-31.39,5.63) A31(-28.85,8.17) A32(-28.85,5.63) A33(-26.31,8.17) A34(-26.31,5.63) A35(-23.77,8.17) A36(-23.77,5.63) A37(-21.23,8.17) A38(-21.23,5.63) A39(-18.69,8.17) A40(-18.69,5.63) A41(-16.15,8.17) A42(-16.15,5.63) A43(-13.61,8.17) A44(-13.61,5.63) A45(-11.07,8.17) A46(-11.07,5.63) A47(-8.53,8.17) A48(-8.53,5.63) A49(-5.99,8.17) A50(-5.99,5.63) A51(-3.45,8.17) A52(-3.45,5.63) B2(-20.12,-84.7) B3(-22.66,-87.24) B4(-22.66,-84.7) B5(-25.2,-87.24) B6(-25.2,-84.7) B7(-27.74,-87.24) B8(-27.74,-84.7) B9(-30.28,-87.24) B10(-30.28,-84.7) B11(-32.82,-87.24) B12(-32.82,-84.7) B13(-35.36,-87.24) B14(-35.36,-84.7) B15(-37.9,-87.24) B16(-37.9,-84.7) B17(-40.44,-87.24) B18(-40.44,-84.7) B19(-42.98,-87.24) B20(-42.98,-84.7) B21(-45.52,-87.24) B22(-45.52,-84.7) B23(-48.06,-87.24) B24(-48.06,-84.7) B25(-50.6,-87.24) B26(-50.6,-84.7) B27(-53.14,-87.24) B28(-53.14,-84.7) B29(-55.68,-87.24) B30(-55.68,-84.7) B31(-58.22,-87.24) B32(-58.22,-84.7) B33(-60.76,-87.24) B34(-60.76,-84.7) B35(-63.3,-87.24) B36(-63.3,-84.7)
  round 6 hole 3.5: MT5(0,0) MT6(-71,0) MT7(0,-81) MT8(-71,-81)
  silkscreen extent -76,-89.78 3.6,10.71
DL-8*10.5 [mm]
  rect 1.5x4 smd: 1(0,3.5) 2(0,-3.5)
  silkscreen extent -4,-4 4,4
HDR1X3 [mm] "Connector; Header; 3 Position"
  rect 1.5x1.5 hole 0.9: 1(0,0)
  round 1.5 hole 0.9: 2(2.54,0) 3(5.08,0)
  silkscreen extent -1.27,-1.27 6.35,1.27
HDR2X5 [mm] "Connector; Header; 5x2 Position"
  rect 1.5x1.5 hole 0.9: 1(0,0)
  round 1.5 hole 0.9: 2(0,2.54) 3(2.54,0) 4(2.54,2.54) 5(5.08,0) 6(5.08,2.54) 7(7.62,0) 8(7.62,2.54) 9(10.16,0) 10(10.16,2.54)
  silkscreen extent -1.27,-1.27 11.43,3.81
IND_8.2UH_3A [mm]
  rect 2x2.2 smd: 1(0,-2.9) 2(0,2.9)
  silkscreen extent -3.7,-3.7 3.7,3.7
LED0603 [mm]
  rect 1x0.9 smd: 1(0,0) 2(0,-1.6)
  silkscreen extent -0.7,-2.5 0.7,0.6
LQFP44 [mm]
  oval 1.6x0.4 smd: 1(0,0)
  rect 1.6x0.4 smd: 2(0,-0.8) 3(0,-1.6) 4(0,-2.4) 5(0,-3.2) 6(0,-4) 7(0,-4.8) 8(0,-5.6) 9(0,-6.4) 10(0,-7.2) 11(0,-8) 23(12,-8) 24(12,-7.2) 25(12,-6.4) 26(12,-5.6) 27(12,-4.8) 28(12,-4) 29(12,-3.2) 30(12,-2.4) 31(12,-1.6) 32(12,-0.8) 33(12,0)
  rect 0.4x1.6 smd: 12(2,-10) 13(2.8,-10) 14(3.6,-10) 15(4.4,-10) 16(5.2,-10) 17(6,-10) 18(6.8,-10) 19(7.6,-10) 20(8.4,-10) 21(9.2,-10) 22(10,-10) 34(10,2) 35(9.2,2) 36(8.4,2) 37(7.6,2) 38(6.8,2) 39(6,2) 40(5.2,2) 41(4.4,2) 42(3.6,2) 43(2.8,2) 44(2,2)
  silkscreen extent 1.33,-8.67 10.67,0.67
LQFP48 [mm]
  oval 1.2x0.3 smd: 1(0,0)
  rect 1.2x0.3 smd: 2(0,-0.5) 3(0,-1) 4(0,-1.5) 5(0,-2) 6(0,-2.5) 7(0,-3) 8(0,-3.5) 9(0,-4) 10(0,-4.5) 11(0,-5) 12(0,-5.5) 25(9,-5.5) 26(9,-5) 27(9,-4.5) 28(9,-4) 29(9,-3.5) 30(9,-3) 31(9,-2.5) 32(9,-2) 33(9,-1.5) 34(9,-1) 35(9,-0.5) 36(9,0)
  rect 0.3x1.2 smd: 13(1.75,-7.25) 14(2.25,-7.25) 15(2.75,-7.25) 16(3.25,-7.25) 17(3.75,-7.25) 18(4.25,-7.25) 19(4.75,-7.25) 20(5.25,-7.25) 21(5.75,-7.25) 22(6.25,-7.25) 23(6.75,-7.25) 24(7.25,-7.25) 37(7.25,1.75) 38(6.75,1.75) 39(6.25,1.75) 40(5.75,1.75) 41(5.25,1.75) 42(4.75,1.75) 43(4.25,1.75) 44(3.75,1.75) 45(3.25,1.75) 46(2.75,1.75) 47(2.25,1.75) 48(1.75,1.75)
  silkscreen extent 1.13,-6.11 7.86,0.62
MARK [mm]
  round 1 smd paste-0.5 mask+0.6: ""(0,0)
  Keep-Out Layer circle w0.2: c0,0 r1.2
MM3Z5V1ST1G [mm]
  rect 1x1 smd: 1(-1.35,0) 2(1.35,0)
  silkscreen extent -2.5,-0.7 2.1,0.7
NPN [mil]
  rect 36x50 smd: 1(38,80)
  rect 36x36 smd: 2(0,0) 3(75,0)
  silkscreen extent -20,-5 95,85
PSO8 [mm]
  rect 0.6x1.9 smd: 1(0,0) 2(1.27,0) 3(2.54,0) 4(3.81,0) 5(3.81,5.56) 6(2.54,5.56) 7(1.27,5.56) 8(0,5.56)
  rect 3x2.4 smd: 9(1.9,2.78)
  silkscreen extent -1.1,-0.11 4.4,4.7
SDCARD [mm]
  rect 1x1.5 smd: 1(6.88,0.75) 2(4.38,0.75) 3(1.08,0.75) 4(-0.63,0.75) 5(-3.13,0.75) 6(-5.63,0.75) 7(-8.05,0.75) 8(-9.75,0.75) 9(9.38,0.75) 10(2.73,0.75) 11(-13.1,0.75)
  rect 1.2x2 smd: ""(-13.6,-21.45) ""(14.4,-20.25)
  Keep-Out Layer circle w0.2: c-12.1,-23.55 r0.75
  Keep-Out Layer circle w0.2: c12.1,-23.55 r0.75
  silkscreen extent -14.2,-28.8 14.2,0
sim800 [mm]
  oval 1.6x0.75 smd: 1(0,0) 2(0,-1) 3(0,-2) 4(0,-3) 5(0,-4) 6(0,-5) 7(0,-6) 8(0,-7) 9(0,-8) 10(0,-9) 11(0,-10) 12(0,-11) 13(0,-12) 14(0,-13) 15(0,-14) 16(0,-15) 17(0,-16) 35(24,-16) 36(24,-15) 37(24,-14) 38(24,-13) 39(24,-12) 40(24,-11) 41(24,-10) 42(24,-9) 43(24,-8) 44(24,-7) 45(24,-6) 46(24,-5) 47(24,-4) 48(24,-3) 49(24,-2) 50(24,-1) 51(24,0)
  oval 0.75x1.6 smd: 18(4,-20) 19(5,-20) 20(6,-20) 21(7,-20) 22(8,-20) 23(9,-20) 24(10,-20) 25(11,-20) 26(12,-20) 27(13,-20) 28(14,-20) 29(15,-20) 30(16,-20) 31(17,-20) 32(18,-20) 33(19,-20) 34(20,-20) 52(20,4) 53(19,4) 54(18,4) 55(17,4) 56(16,4) 57(15,4) 58(14,4) 59(13,4) 60(12,4) 61(11,4) 62(10,4) 63(9,4) 64(8,4) 65(7,4) 66(6,4) 67(5,4) 68(4,4)
  silkscreen extent 0,-20 24,4
SIM_CARD1 [mm] "抽屉式SIM卡座"
  rect 6.604x1.524 smd: 1(12.15,2.3) 2(12.15,-0.2) 3(12.15,-2.7) ""(12.15,-10.1)
  rect 7.62x1.524 smd: 4(-11.85,2.3) 5(-11.85,-0.2) 6(-11.85,-2.7) ""(-11.85,-10.1)
  silkscreen extent -16.85,-12.3 16.01,12.33
SMD-XTAL-5032 [mm]
  rect 1.7x1.4 smd: 1(-1.9,-1.2) 2(1.9,1.2) ""(-1.9,1.2) ""(1.9,-1.2)
  silkscreen extent -2.5,-2.7 2.5,1.6
SO-16 [mil] "Small Outline; 16 Leads; Body Width 5.6 mm; Pitch 1.27 mm"
  oval 24x80 smd: 1(0,0) 2(50,0) 3(100,0) 4(150,0) 5(200,0) 6(250,0) 7(300,0) 8(350,0) 9(350,220) 10(300,220) 11(250,220) 12(200,220) 13(150,220) 14(100,220) 15(50,220) 16(0,220)
  silkscreen extent -25,60 375,160
SOD323 [mm]
  rect 1x1 smd: 1(-1.35,0) 2(1.35,0)
  silkscreen extent -2.1,-0.7 2.1,0.7
SOT23-6 [mm]
  rect 0.5x1 smd: 1(0,0) 2(1,0) 3(2,0) 4(2,3) 5(1,3) 6(0,3)
  silkscreen extent -0.7,0.6 2.7,2.4
SOT143 [mm] "SOT-143; 4 Leads; Body 3 x 2.5 mm, inc. leads (LxW max)"
  rect 1.4x1.1 smd: 1(-0.05,0)
  rect 0.95x1.1 smd: 2(1.65,0) 3(1.65,2.4) 4(-0.25,2.4)
  silkscreen extent -1.05,-1.12 2.45,1.9
SOT-223 [mm]
  rect 1x1.5 smd: 1(-2.3,0) 2(0,0) 3(2.3,0)
  rect 3.3x1.5 smd: 2(0,6.3)
  silkscreen extent -3.3,1 3.3,5.3
TO-263 [mm]
  rect 1.1x4.3 smd: 1(0,0.1) 2(1.7,0.1) 3(3.4,0.1) 4(5.1,0.1) 5(6.8,0.1)
  rect 10.8x10.4 smd: ""(3.4,9)

## Part data
C1 C3 C4 C5 C7 C8 C9 C10 C11 C12 C14 C15 C28 C31 C54 C55 C56 C57 C58 C59 C60 C62: library part Cap, "Capacitor"
C2 C6 C13: library part "CAP WP"
C16 C20 C21 C22 C23 C24 C25 C64 C65 C67 C74 C75 C76 C77: library part "CAP NP_Dup2"
C17 C19 C61 C63: library part CAP_Dup1
C18 C66 C68 C69 C70 C71: library part CAP
C26 C27 C29 C30 C32 C35 C36 C37 C38 C39 C40 C41 C42 C43 C45 C46 C47 C48 C49 C51 C52 C53: library part "P_CAP NP"
C33 C34: library part "Cap Pol1", "Polarized Capacitor (Radial)"
D1 D2 D3 D4 D5 D11: library part "Diode 11DQ03", "Schottky Rectifier"
D6 D7 D8 D9 D12 D13: library part LN01401_1
D10: library part MMGZ5231BPTLL34
D14 D15 D16 D17 D18 D19 D20 D21 D22 D23 D24 D25 D28 D29 D30 D31 D32 D33 D34 D35: library part PESD
F1: library part 2A_32VDC_0467-002
J1 J11 J14: library part "Header 4", "Header, 4-Pin"
J2: library part "Header 2", "Header, 2-Pin"
J5: "Header, 3-Pin"
J6: "Header, 5-Pin"
J8 J9 J13: library part "Header 3", "Header, 3-Pin"
J10: library part "Header 5X2", "Header, 5-Pin, Dual row"
J15: "Header, 10-Pin, Dual row"
L1 L2: library part 4.7UH_CDH2D09BNP-4R7MC_0.7A_20%
M1: library part CPU-BOARD_4
Q1 Q2 Q3 Q4: library part MMBT3904_NL_SOT23-3
R1 R2 R3 R4 R5 R6 R23 R24 R40 R41 R42 R43 R44 R47 R48: library part Res3, "Resistor"
R7 R8 R9 R10 R11 R12 R13 R14 R15 R16 R17 R18 R45 R46 R50 R51 R52 R53: library part CR16-1003FM
R19 R20: library part R
R21 R22 R25 R26 R27 R28 R29 R30 R33 R36 R38 R39 R49: library part P_R
U1 U3: library part LM22670_0
U5: library part MAX811
U9: library part STM32F100XX-LQFP48
Y1 Y2: library part CRYSTAL

## Free pads (board coordinates)
  round 6 hole 3.5: MT1(3.5,90) MT3(152.5,5) MT4(152.5,90)
  round 6 hole 3.5 paste+0: MT2(3.5,5)

## Via types
v1: diameter 0.6, hole 0.3, Top Layer to Bottom Layer, tented both sides, 698 vias
v2: diameter 0.8, hole 0.5, Top Layer to Bottom Layer, tented both sides, 14 vias
v3: diameter 1, hole 0.6, Top Layer to Bottom Layer, tented both sides, 5 vias
v4: diameter 1, hole 0.7, Top Layer to Bottom Layer, tented both sides, 2 vias

## Nets (pads, with @x,y where several pads share a name; then routed paths per layer and width w, separated by ;. In a path a pad name is that pad's centre, name@x,y a point inside that pad or via, vN(x,y) a via of type N, cw(c..) or ccw(c..) an arc to the next point about the centre after c; other vN are vias at no path point)
+3.3V: C12.2 C13.1 C21.1 C22.1 C54.1 C55.1 C56.1 C57.1 C58.1 C59.1 C60.1 C66.1 J10.1 J10.2 L2.2 M1.B31 M1.B32 M1.B33 M1.B34 R5.2 R41.1 R42.1 R43.1 U9.1 U9.9 U9.24 U9.36 U9.48 U11.16 | length 42.5
  Top Layer w0.2: v1(110.1,13) R5.2@111.3,13
  Bottom Layer w0.254: C57.1@78.6,57.7 80.4,57.7 80.65,57.95 U9.48@82.15,57.95 ; C60.1@82.9,62.8 82.9,61.7 83.9,60.7 U9.1@83.9,59.7 ; C56.1@83.2,47.6 83.2,49.1 83.9,49.8 U9.36@83.9,50.7 ; U9.9@87.9,59.7 87.9,60.8 88.8,61.7 C54.1@88.8,62.8 ; U9.24@91.15,52.45 v1@92.45,52.45 ; v1(92.5,52.3) C55.1@94,52.3
  Bottom Layer w0.5: C66.1@18.3,25.1 U11.16@21.412,25.1 ; C54.1@88.8,62.8 C59.1@90.7,62.8 ; C55.1@94,52.3 94,54.1 C58.1@94.1,54.2 ; J10.1@114.3,63.5 114.8,63.5 118.3,67 R43.1@118.3,68 R42.1@118.3,69.9 R41.1@118.3,71.8
  Bottom Layer w0.7: v1(122.8,22.7) C12.2@124.6,22.7
  Bottom Layer w1: v1(108.8,63.5) J10.2@111.76,63.5 J10.1@114.3,63.5
  other v1: 123.4,22.7 118,24.3 118.9,24.3 19.7,25.1 117.1,25.2 118,25.2 118.9,25.2 117.1,26.1 118,26.1 118.9,26.1 117.1,27 118,27 118.9,27 119.8,27 120.7,27 117.1,27.9 118,27.9 118.9,27.9 119.8,27.9 120.7,27.9 117.1,28.8 118,28.8 118.9,28.8 119.8,28.8 120.7,28.8 83.2,48.8 79.9,57.7 83.4,61.2 88.4,61.3 109.7,63.5
+4V: C26.1 C33.1 C34.1 C35.1 C36.1 C37.1 M2.55 M2.56 M2.57 R26.1 R30.1 U7.2 U7.3 | length 46.2
  Top Layer w0.5: R30.1@92.9,4 92.9,5.5 ; v1(92.9,7.5) 92.9,5.5 ; R26.1@98.1,4 98.1,5.2 97.4,5.9 93.3,5.9 92.9,5.5
  Top Layer w0.8: v1(65.2,9.1) C37.1@72,9.1 ; C36.1@72,7.2 C37.1@72,9.1 ; C35.1@72,11 C37.1@72,9.1
  Bottom Layer w0.5: C26.1@38.7,41.4 v1(38.7,42.7) ; v1(74.1,15) 88.9,15 92.9,11 v1(92.9,7.5)
  other v1: 63.4,5.1 64.3,5.1 65.2,5.1 66.1,5.1 63.4,6.1 64.3,6.1 65.2,6.1 66.1,6.1 63.4,7.1 64.3,7.1 65.2,7.1 66.1,7.1 63.4,8.1 64.3,8.1 65.2,8.1 66.1,8.1 63.4,9.1 64.3,9.1 66.1,9.1 67,9.1 63.4,10.1 64.3,10.1 65.2,10.1 66.1,10.1 63.4,11.1 64.3,11.1 65.2,11.1 66.1,11.1 63.4,12.1 64.3,12.1 65.2,12.1 66.1,12.1 63.4,13.1 64.3,13.1 65.2,13.1 66.1,13.1
  other v2: 36.2,31.2 37.3,31.2 38.4,31.2 39.5,31.2 36.2,32.3 37.3,32.3 38.4,32.3 39.5,32.3 36.2,33.4 37.3,33.4 38.4,33.4 39.5,33.4
+5V: C5.2 C6.1 C23.1 C24.1 C28.2 L1.2 M1.A41 M1.A42 M1.A43 M1.A44 M1.A45 M1.A46 M1.A51 M1.A52 R2.2 U6.1 U6.2 | length 3.6
  Top Layer w0.2: R2.2@139.2,33.7 v1(139.2,35)
  Bottom Layer w0.7: C5.2@144.3,41.1 v1(146.6,41.1)
  other v1: 148,37 148.9,37 149.8,37 150.7,37 148,37.9 148.9,37.9 149.8,37.9 150.7,37.9 149.8,38.8 150.7,38.8 149.8,39.7 150.7,39.7 148,40.6 148.9,40.6 149.8,40.6 150.7,40.6 145.9,41.1 148,41.5 148.9,41.5 149.8,41.5 150.7,41.5 28.9,43.3 29.9,43.3 30.9,43.3 28.9,44.3 29.9,44.3 30.9,44.3 28.9,45.3 29.9,45.3 30.9,45.3 28.9,46.3 29.9,46.3 30.9,46.3 28.9,47.3 29.9,47.3 30.9,47.3 28.9,48.3 29.9,48.3 30.9,48.3
ACC: D10.1 F1.1 J1.4 | length 4.1
  Top Layer w0.5: D10.1@149,48.25 149.05,48.2 v1(153.1,48.2)
  other v3: 123.8,86.4 123.8,87.7 123.8,89 123.8,90.3 123.8,91.6
ACC-IN: Q1.1 R18.2 U4.24 | length 6.8
  Top Layer w0.2: U4.24@136.6,54.7 R18.2@139.3,54.7 ; R18.2@139.5,54.5 139.5,50.833 Q1.1@139.568,50.765 Q1.1@139.8,50.997
AUDIO-IN1: D28.1 J15.1 M1.B11 | length 68.4
  Top Layer w0.2: v1(120.3,73.6) 138.6,73.6 141.3,76.3 141.3,81.4 J15.1@139.9,82.8
  Bottom Layer w0.2: M1.B11@105.44,49.08 105.46,49.1 113.3,49.1 116.6,52.4 116.6,62.5 120.8,66.7 120.8,73 120.3,73.5 v1(120.3,73.6)
  Bottom Layer w0.5: J15.1@139.9,82.8 D28.1@139.9,86.35
AUDIO-IN2: D33.2 J15.7 M1.B12 | length 62.1
  Top Layer w0.2: v1(123.4,81) 131.7,81 132.28,81.58 J15.7@132.28,82.8
  Bottom Layer w0.2: M1.B12@102.9,49.08 104.08,47.9 107.5,47.9 107.8,48.2 113.673,48.2 117.5,52.027 117.5,62.127 121.7,66.327 121.7,76.2 123.4,77.9 v1(123.4,81)
  Bottom Layer w0.5: J15.7@132.28,82.8 132.3,82.82 D33.2@132.3,86.35
AUDIO-IN3: D30.1 J15.2 M1.B13 | length 63.6
  Top Layer w0.2: v1(122.9,74.7) 123.2,74.7 123.4,74.5 138.227,74.5 139.9,76.173 J15.2@139.9,78.8
  Bottom Layer w0.2: M1.B13@105.44,46.54 107.64,46.54 108.4,47.3 114.046,47.3 118.405,51.659 118.405,61.759 122.6,65.954 122.6,74.3 122.9,74.6 v1(122.9,74.7)
  Bottom Layer w0.5: D30.1@139.9,75.55 J15.2@139.9,78.8
AUDIO-IN4: D35.2 J15.8 M1.B14 | length 60.2
  Top Layer w0.2: v1(124,76.7) 131.7,76.7 132.28,77.28 J15.8@132.28,78.8
  Bottom Layer w0.2: M1.B14@102.9,46.54 102.9,46.3 103.9,45.3 104.8,45.3 106.751,45.3 107.151,45.7 109,45.7 109.7,46.4 114.418,46.4 119.305,51.286 119.305,61.386 123.5,65.582 123.5,73.564 124,74.064 124,75.8 v1(124,76.7)
  Bottom Layer w0.5: J15.8@132.28,78.8 132.28,75.57 D35.2@132.3,75.55
B-CLK: C74.1 D18.2 J3.5 R50.2 | length 51.8
  Top Layer w0.2: R50.2@18.5,56.6 19.4,56.6 30.3,67.5 30.3,69.3 33.9,72.9 34.7,72.9 ccw(c34.7,73.127) 34.927,73.127 34.927,73.256 cw(c35.154,73.256) 35.154,73.483 cw(c35.154,73.256) 35.381,73.256 35.381,72.9 35.381,72.544 ccw(c35.608,72.544) 35.608,72.317 ccw(c35.608,72.544) 35.835,72.544 35.835,72.9 35.835,73.256 cw(c36.062,73.256) 36.062,73.483 cw(c36.062,73.256) 36.289,73.256 36.289,72.9 36.289,72.544 ccw(c36.516,72.544) 36.516,72.317 ccw(c36.516,72.544) 36.743,72.544 36.743,72.9 36.743,73.256 cw(c36.97,73.256) 36.97,73.483 cw(c36.97,73.256) 37.197,73.256 37.197,72.9 37.197,72.544 ccw(c37.424,72.544) 37.424,72.317 ccw(c37.424,72.544) 37.651,72.544 37.651,72.9 37.651,73.256 cw(c37.878,73.256) 37.878,73.483 cw(c37.878,73.256) 38.105,73.256 38.105,72.9 38.105,72.544 ccw(c38.332,72.544) 38.332,72.317 ccw(c38.332,72.544) 38.559,72.544 38.559,72.9 38.559,73.256 cw(c38.786,73.256) 38.786,73.483 cw(c38.786,73.256) 39.013,73.256 39.013,72.9 39.013,72.544 ccw(c39.24,72.544) 39.24,72.317 ccw(c39.24,72.544) 39.467,72.544 39.467,72.673 cw(c39.694,72.673) 39.694,72.9 40.4,72.9 44.8,72.9 46.33,71.37 J3.5@46.33,68.75 46.33,66.57 C74.1@46.4,66.5 D18.2@47.5,66.5
B-CMD: C67.1 D17.2 J3.2 R46.2 | length 51.8
  Top Layer w0.2: R46.2@18.5,50.9 22.3,50.9 24.1,52.7 ccw(c23.939,52.861) 24.1,53.021 24.003,53.118 cw(c24.164,53.279) 24.003,53.439 cw(c24.164,53.279) 24.324,53.439 24.582,53.182 24.839,52.924 ccw(c25,53.085) 25.16,52.924 ccw(c25,53.085) 25.16,53.245 24.903,53.503 24.645,53.76 cw(c24.806,53.921) 24.645,54.081 cw(c24.806,53.921) 24.966,54.081 25.224,53.824 25.481,53.566 ccw(c25.642,53.727) 25.802,53.566 ccw(c25.642,53.727) 25.802,53.887 25.545,54.145 25.287,54.402 cw(c25.448,54.563) 25.287,54.723 cw(c25.448,54.563) 25.608,54.723 25.866,54.466 26.123,54.208 ccw(c26.284,54.369) 26.444,54.208 ccw(c26.284,54.369) 26.444,54.529 26.187,54.787 25.929,55.044 cw(c26.09,55.205) 25.929,55.365 cw(c26.09,55.205) 26.25,55.365 26.508,55.108 26.765,54.85 ccw(c26.926,55.011) 27.086,54.85 ccw(c26.926,55.011) 27.086,55.171 26.829,55.429 26.571,55.686 cw(c26.732,55.847) 26.571,56.007 cw(c26.732,55.847) 26.892,56.007 27.15,55.75 27.407,55.492 ccw(c27.568,55.653) 27.728,55.492 ccw(c27.568,55.653) 27.728,55.813 27.471,56.071 27.213,56.328 cw(c27.374,56.489) 27.213,56.649 cw(c27.374,56.489) 27.534,56.649 27.792,56.392 28.049,56.134 ccw(c28.21,56.295) 28.37,56.134 ccw(c28.21,56.295) 28.37,56.455 28.113,56.713 27.855,56.97 cw(c28.016,57.131) 27.855,57.291 cw(c28.016,57.131) 28.176,57.291 28.434,57.034 28.691,56.776 ccw(c28.852,56.937) 29.012,56.776 ccw(c28.852,56.937) 29.012,57.097 28.755,57.355 28.497,57.612 cw(c28.658,57.773) 28.497,57.933 cw(c28.658,57.773) 28.818,57.933 29.076,57.676 29.333,57.418 ccw(c29.494,57.579) 29.654,57.418 ccw(c29.494,57.579) 29.654,57.739 29.397,57.997 29.139,58.254 cw(c29.3,58.415) 29.139,58.575 cw(c29.3,58.415) 29.46,58.575 29.718,58.318 29.975,58.06 ccw(c30.136,58.221) 30.296,58.06 ccw(c30.136,58.221) 30.296,58.381 30.039,58.639 29.781,58.896 cw(c29.942,59.057) 29.781,59.218 cw(c29.942,59.057) 30.103,59.218 30.199,59.121 ccw(c30.36,59.281) 30.521,59.121 30.55,59.15 33.2,61.8 38.3,61.8 39.5,63 39.5,65.9 38.9,66.5 D17.2@38.8,66.5 ; C67.1@37.7,66.5 D17.2@38.8,66.5 ; J3.2@38.82,68.75 38.82,66.52 D17.2@38.8,66.5
B-DAT0: C75.1 D19.2 J3.7 R51.2 | length 51.8
  Top Layer w0.2: R51.2@18.5,49 23.6,49 27.7,53.1 ccw(c27.539,53.261) 27.7,53.421 27.618,53.503 cw(c27.779,53.663) 27.618,53.824 cw(c27.779,53.663) 27.939,53.824 28.182,53.582 28.424,53.339 ccw(c28.584,53.5) 28.745,53.339 ccw(c28.584,53.5) 28.745,53.66 28.503,53.903 28.26,54.145 cw(c28.421,54.305) 28.26,54.466 cw(c28.421,54.305) 28.581,54.466 28.824,54.224 29.066,53.981 ccw(c29.226,54.142) 29.387,53.981 ccw(c29.226,54.142) 29.387,54.302 29.145,54.545 28.902,54.787 cw(c29.063,54.947) 28.902,55.108 cw(c29.063,54.947) 29.223,55.108 29.466,54.866 29.708,54.623 ccw(c29.868,54.784) 30.029,54.623 ccw(c29.868,54.784) 30.029,54.944 29.787,55.187 29.544,55.429 cw(c29.705,55.589) 29.544,55.75 cw(c29.705,55.589) 29.865,55.75 29.947,55.668 ; 29.947,55.668 ccw(c30.108,55.829) 30.268,55.668 30.45,55.85 34.7,60.1 47.3,60.1 49.5,62.3 49.5,65.8 50.2,66.5 C75.1@52.3,66.5 ; D19.2@51.2,66.5 51.25,66.55 J3.7@51.25,68.75
B-DAT1: C76.1 D20.2 J3.8 R52.2 | length 49.3
  Top Layer w0.2: R52.2@18.5,47.1 23.8,47.1 34.6,57.9 48.9,57.9 53.1,62.1 53.1,66.5 ; J3.8@52.95,68.75 53.1,68.6 53.1,66.5 ; C76.1@54.9,66.5 53.1,66.5
B-DAT2: C77.1 D21.2 J3.9 R53.2 | length 51.8
  Top Layer w0.2: R53.2@18.5,54.7 19.9,54.7 20.45,55.25 ccw(c20.289,55.411) 20.45,55.571 20.354,55.667 cw(c20.515,55.827) 20.354,55.988 cw(c20.515,55.827) 20.675,55.988 20.932,55.732 21.188,55.475 ccw(c21.348,55.636) 21.509,55.475 ccw(c21.348,55.636) 21.509,55.796 21.253,56.053 20.996,56.309 cw(c21.157,56.47) 20.996,56.63 cw(c21.157,56.47) 21.317,56.63 21.574,56.374 21.83,56.117 ccw(c21.991,56.278) 22.151,56.117 ccw(c21.991,56.278) 22.151,56.438 21.895,56.695 21.638,56.951 cw(c21.799,57.112) 21.638,57.272 cw(c21.799,57.112) 21.959,57.272 22.216,57.016 22.472,56.759 ccw(c22.633,56.92) 22.793,56.759 ccw(c22.633,56.92) 22.793,57.08 22.537,57.337 22.28,57.593 cw(c22.441,57.754) 22.28,57.914 cw(c22.441,57.754) 22.601,57.914 22.858,57.658 23.114,57.401 ccw(c23.275,57.562) 23.435,57.401 ccw(c23.275,57.562) 23.435,57.722 23.179,57.979 22.922,58.235 cw(c23.083,58.396) 22.922,58.556 cw(c23.083,58.396) 23.243,58.556 23.5,58.3 23.756,58.043 ccw(c23.917,58.204) 24.077,58.043 ccw(c23.917,58.204) 24.077,58.364 23.821,58.621 23.564,58.877 cw(c23.725,59.038) 23.564,59.198 cw(c23.725,59.038) 23.885,59.198 24.142,58.942 24.398,58.685 ccw(c24.559,58.846) 24.719,58.685 ccw(c24.559,58.846) 24.719,59.006 24.463,59.263 24.206,59.519 cw(c24.367,59.68) 24.206,59.84 cw(c24.367,59.68) 24.527,59.84 24.784,59.584 25.04,59.327 ccw(c25.201,59.488) 25.361,59.327 ccw(c25.201,59.488) 25.361,59.648 25.105,59.905 24.848,60.161 cw(c25.009,60.322) 24.848,60.482 cw(c25.009,60.322) 25.169,60.482 25.426,60.226 25.682,59.969 ccw(c25.843,60.13) 26.003,59.969 ccw(c25.843,60.13) 26.003,60.291 25.747,60.547 25.491,60.803 cw(c25.651,60.964) 25.49,61.124 cw(c25.651,60.964) 25.812,61.124 26.068,60.868 26.324,60.612 ccw(c26.485,60.772) 26.645,60.612 ccw(c26.485,60.772) 26.645,60.933 26.389,61.189 26.133,61.445 cw(c26.293,61.606) 26.133,61.766 cw(c26.293,61.606) 26.454,61.766 26.71,61.51 26.966,61.254 ccw(c27.127,61.414) 27.287,61.254 ccw(c27.127,61.414) 27.287,61.575 27.031,61.831 26.775,62.087 cw(c26.935,62.248) 26.775,62.408 cw(c26.935,62.248) 27.096,62.408 27.352,62.152 27.608,61.896 ccw(c27.769,62.056) 27.93,61.896 ccw(c27.769,62.056) 27.93,62.217 27.673,62.473 27.417,62.73 cw(c27.577,62.89) 27.417,63.051 cw(c27.577,62.89) 27.738,63.051 27.994,62.794 28.251,62.538 ccw(c28.411,62.698) 28.572,62.538 ccw(c28.411,62.698) 28.572,62.859 28.315,63.115 28.059,63.372 cw(c28.219,63.532) 28.059,63.693 cw(c28.219,63.532) 28.38,63.693 28.636,63.436 28.893,63.18 ccw(c29.053,63.34) 29.214,63.18 ccw(c29.053,63.34) 29.214,63.501 28.957,63.757 28.701,64.014 cw(c28.861,64.174) 28.701,64.335 cw(c28.861,64.174) 29.022,64.335 29.278,64.078 29.535,63.822 ccw(c29.695,63.982) 29.856,63.822 ccw(c29.695,63.982) 29.856,64.143 29.599,64.399 29.343,64.656 cw(c29.503,64.816) 29.343,64.977 cw(c29.503,64.816) 29.664,64.977 29.92,64.72 30.177,64.464 ccw(c30.337,64.624) 30.498,64.464 ccw(c30.337,64.624) 30.498,64.785 30.4,64.883 cw(c30.559,65.041) 30.4,65.2 31.7,66.5 D21.2@32.7,66.5 C77.1@33.8,66.5 33.8,68.73 J3.9@33.82,68.75
B-DAT3: C65.1 D16.2 J3.1 R45.2 | length 51.8
  Top Layer w0.2: R45.2@18.5,52.8 21.2,52.8 22.4,54 ccw(c22.239,54.161) 22.4,54.321 22.3,54.421 cw(c22.461,54.581) 22.3,54.742 cw(c22.461,54.581) 22.621,54.742 22.882,54.482 23.142,54.221 ccw(c23.302,54.382) 23.463,54.221 ccw(c23.302,54.382) 23.463,54.542 23.203,54.803 22.942,55.063 cw(c23.103,55.223) 22.942,55.384 cw(c23.103,55.223) 23.264,55.384 23.524,55.124 23.784,54.863 ccw(c23.944,55.024) 24.105,54.863 ccw(c23.944,55.024) 24.105,55.185 23.845,55.445 23.585,55.705 cw(c23.745,55.865) 23.585,56.026 cw(c23.745,55.865) 23.906,56.026 24.166,55.766 24.426,55.506 ccw(c24.586,55.666) 24.747,55.506 ccw(c24.586,55.666) 24.747,55.827 24.487,56.087 24.227,56.347 cw(c24.387,56.507) 24.227,56.668 cw(c24.387,56.507) 24.548,56.668 24.808,56.408 25.068,56.148 ccw(c25.228,56.308) 25.389,56.148 ccw(c25.228,56.308) 25.389,56.469 25.129,56.729 24.869,56.989 cw(c25.029,57.149) 24.869,57.31 cw(c25.029,57.149) 25.19,57.31 25.45,57.05 25.71,56.79 ccw(c25.87,56.95) 26.031,56.79 ccw(c25.87,56.95) 26.031,57.111 25.771,57.371 25.511,57.631 cw(c25.671,57.791) 25.511,57.952 cw(c25.671,57.791) 25.832,57.952 26.092,57.692 26.352,57.432 ccw(c26.512,57.592) 26.673,57.432 ccw(c26.512,57.592) 26.673,57.753 26.413,58.013 26.153,58.273 cw(c26.313,58.433) 26.153,58.594 cw(c26.313,58.433) 26.474,58.594 26.734,58.334 26.994,58.074 ccw(c27.154,58.234) 27.315,58.074 ccw(c27.154,58.234) 27.315,58.395 27.055,58.655 26.795,58.915 cw(c26.955,59.075) 26.795,59.236 cw(c26.955,59.075) 27.116,59.236 27.376,58.976 27.636,58.716 ccw(c27.797,58.876) 27.957,58.716 ccw(c27.797,58.876) 27.957,59.037 27.697,59.297 27.437,59.557 cw(c27.597,59.718) 27.437,59.878 cw(c27.597,59.718) 27.758,59.878 28.018,59.618 28.278,59.358 ccw(c28.439,59.518) 28.599,59.358 ccw(c28.439,59.518) 28.599,59.679 28.339,59.939 28.079,60.199 cw(c28.239,60.36) 28.079,60.52 cw(c28.239,60.36) 28.4,60.52 28.66,60.26 28.92,60 ccw(c29.081,60.16) 29.241,60 ccw(c29.081,60.16) 29.241,60.321 28.981,60.581 28.721,60.841 cw(c28.881,61.002) 28.721,61.162 cw(c28.881,61.002) 29.042,61.162 29.302,60.902 29.562,60.642 ccw(c29.723,60.802) 29.883,60.642 ccw(c29.723,60.802) 29.883,60.963 29.623,61.223 29.363,61.483 cw(c29.524,61.644) 29.363,61.804 cw(c29.524,61.644) 29.684,61.804 29.944,61.544 30.204,61.284 ccw(c30.365,61.445) 30.525,61.284 ccw(c30.365,61.445) 30.525,61.605 30.265,61.865 30.005,62.125 cw(c30.166,62.286) 30.005,62.446 cw(c30.166,62.286) 30.326,62.446 30.572,62.2 ccw(c30.586,62.214) 30.6,62.2 31.8,63.4 33.9,63.4 34.5,64 34.5,66.2 34.8,66.5 C65.1@36.3,66.5 36.32,66.52 J3.1@36.32,68.75
C-RXD: J9.3 U9.31 | length 49.9
  Bottom Layer w0.2: U9.31@86.4,50.7 86.4,55.1 77.8,63.7 77.8,73.866 80.034,76.1 82.934,76.1 87.88,81.046 J9.3@87.88,91.2
C-TXD: J9.2 U9.30 | length 56.6
  Bottom Layer w0.2: J9.2@85.34,91.2 87.04,92.9 88.8,92.9 89.5,92.2 89.5,89.6 88.28,88.38 88.28,80.88 83.1,75.7 80.2,75.7 78.2,73.7 78.2,63.866 86.9,55.166 U9.30@86.9,50.7
CON-RX: J13.3 U11.13 | length 32.2
  Top Layer w0.2: J13.3@3,36.98 3.632,36.348 14.352,36.348 15.6,35.1 15.6,22.7 17,21.3 v1(19,21.3)
  Bottom Layer w0.2: v1(19,21.3) 19.01,21.29 U11.13@21.412,21.29
CON-RXD: M1.A4 U11.12 | length 18.8
  Bottom Layer w0.2: M1.A4@12.57,17.49 16.01,17.49 18.5,15 23.1,15 23.8,15.7 23.8,19.3 23.08,20.02 U11.12@21.412,20.02
CON-TX: J13.2 U11.14 | length 38.3
  Top Layer w0.2: J13.2@3,34.44 1.96,34.44 1,35.4 1,37.2 2.3,38.5 3.5,38.5 5.252,36.748 14.518,36.748 16,35.266 16,24 16.7,23.3 18.9,23.3 v1(19.6,22.6)
  Bottom Layer w0.2: v1(19.6,22.6) 19.64,22.56 U11.14@21.412,22.56
CON-TXD: M1.A6 U11.11 | length 9.4
  Bottom Layer w0.2: M1.A6@12.57,20.03 16.47,20.03 17.75,18.75 U11.11@21.412,18.75
DBG-RXD: J8.2 U9.22 | length 21.3
  Bottom Layer w0.2: U9.22@91.15,53.45 91.901,53.45 92.251,53.8 92.6,53.8 92.9,54.1 92.9,55.2 93.4,55.7 97.3,55.7 97.8,55.2 97.8,44.5 97.14,43.84 J8.2@95.9,43.84
DBG-TXD: J8.1 U9.21 | length 24.7
  Bottom Layer w0.2: U9.21@91.15,53.95 91.15,54 91.874,54 92.074,54.2 92.3,54.2 92.5,54.4 92.5,55.366 93.234,56.1 97.466,56.1 98.2,55.366 98.2,42.2 97.3,41.3 J8.1@95.9,41.3
ERX_N: J14.3 M1.B4 | length 38
  Top Layer w0.19: J14.3@101.08,91.2 102.16,90.12 102.16,88.043 105.8,84.403 105.8,65.2 107.3,63.7 107.3,60.9 106.8,60.4 104.06,60.4 M1.B4@102.9,59.24
ERX_P: J14.4 M1.B3 | length 36.5
  Top Layer w0.19: J14.4@103.62,91.2 102.54,90.12 102.54,88.2 106.18,84.56 106.18,65.357 107.68,63.857 107.68,59.743 107.177,59.24 M1.B3@105.44,59.24
ETX_N: J14.1 M1.B2 | length 34.3
  Top Layer w0.19: J14.1@96,91.2 97.08,90.12 97.08,88.643 98.003,87.72 99.98,87.72 103.92,83.78 103.92,62.8 M1.B2@102.9,61.78